# Altium PCB MMC_2_4.PcbDoc
Units mm, origin at the board's own origin, x right, y up, seen from the top; angles counter-clockwise.
Board outline 99.21 x 82.02 mm, 4 copper layers (Top Layer, 3V3, GND, Bottom Layer), stack 0.778 mm thick; 99 components, 93 nets, 400 pads, 234 vias.
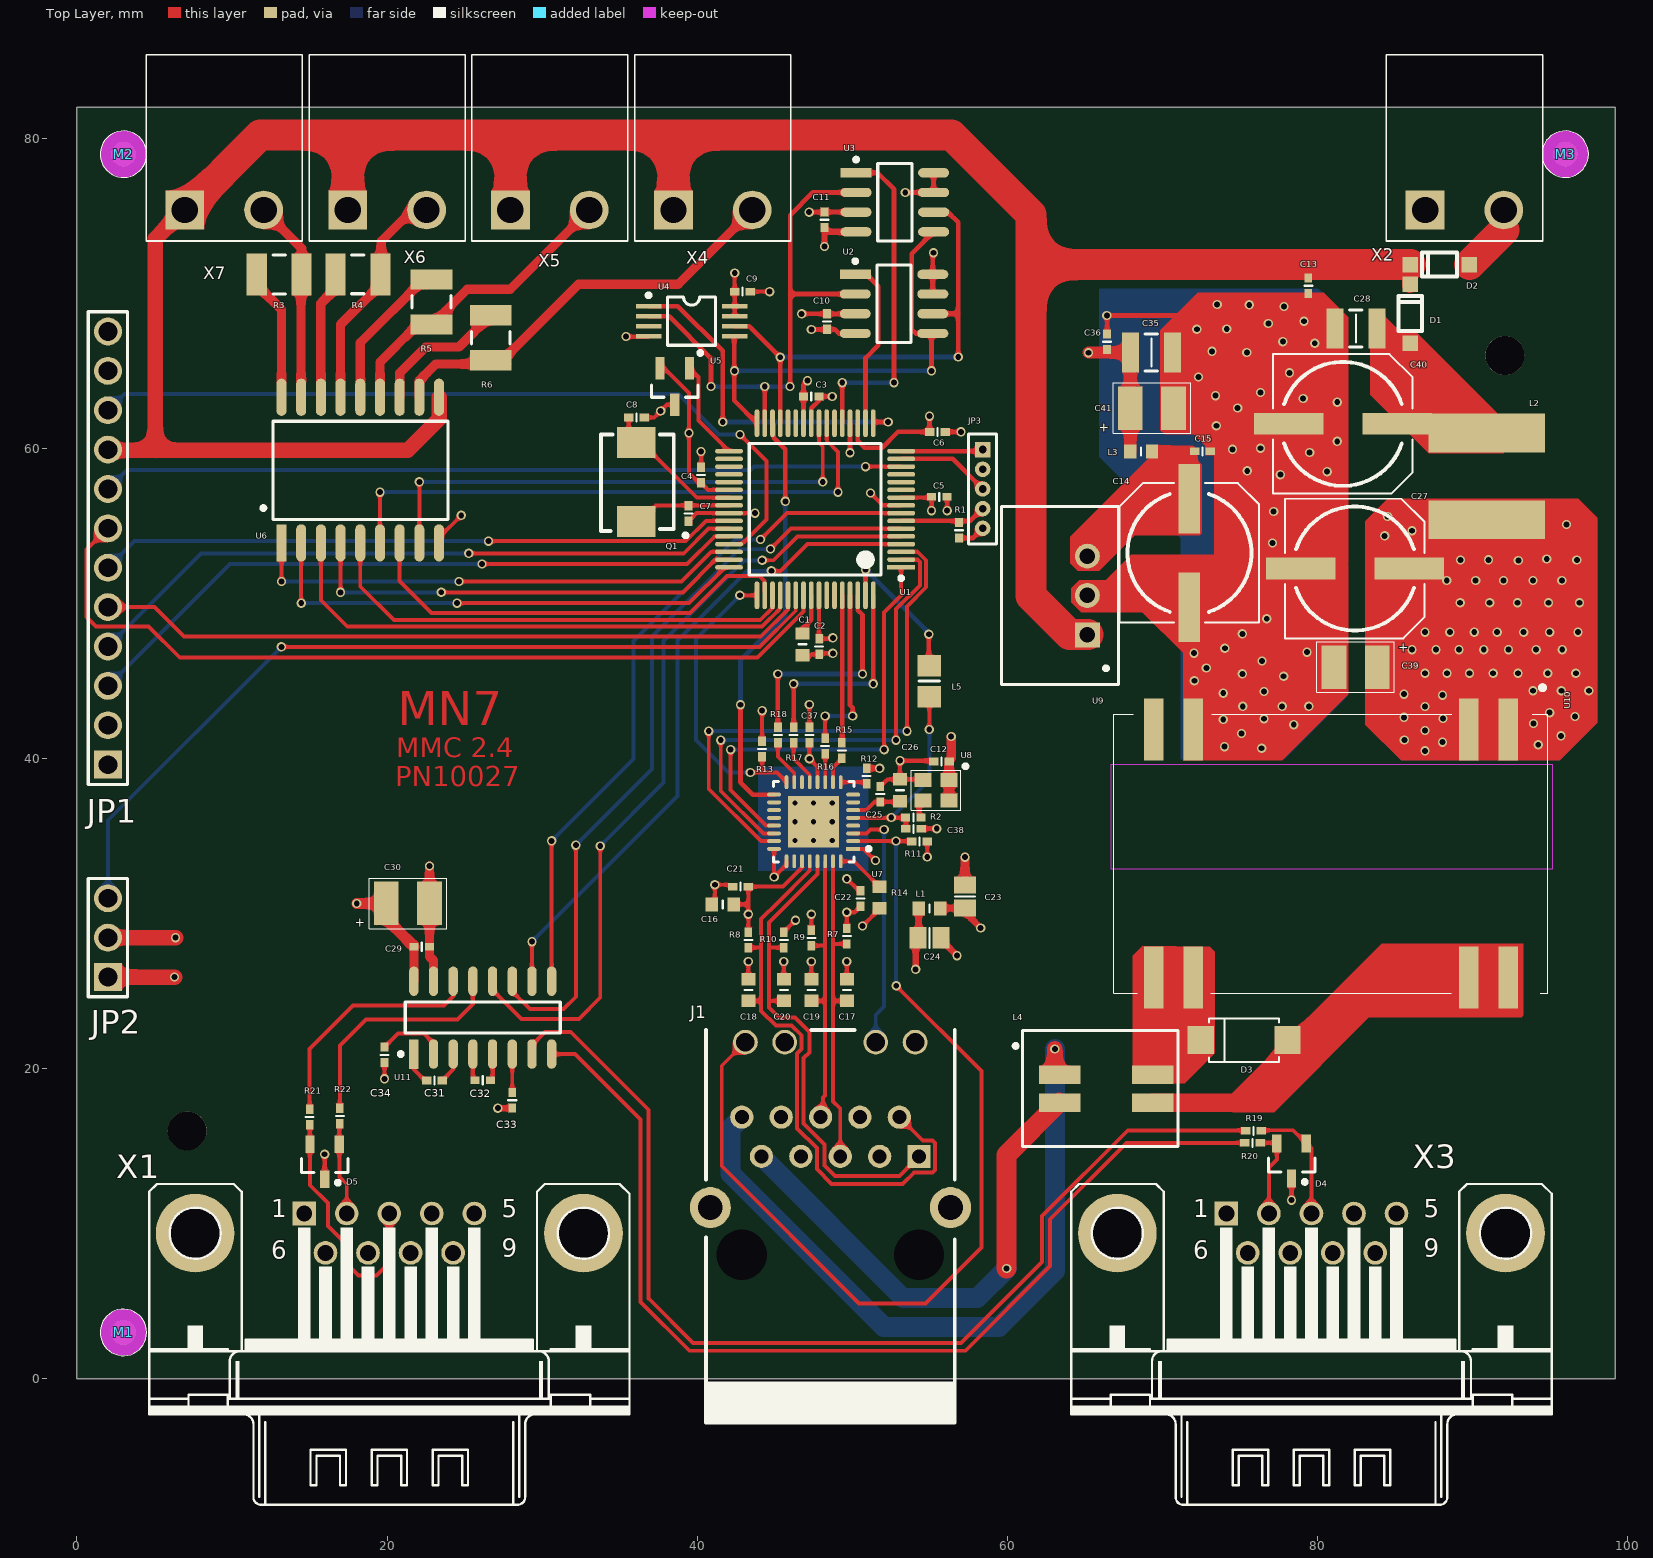
[diagram p0: Top Layer view]
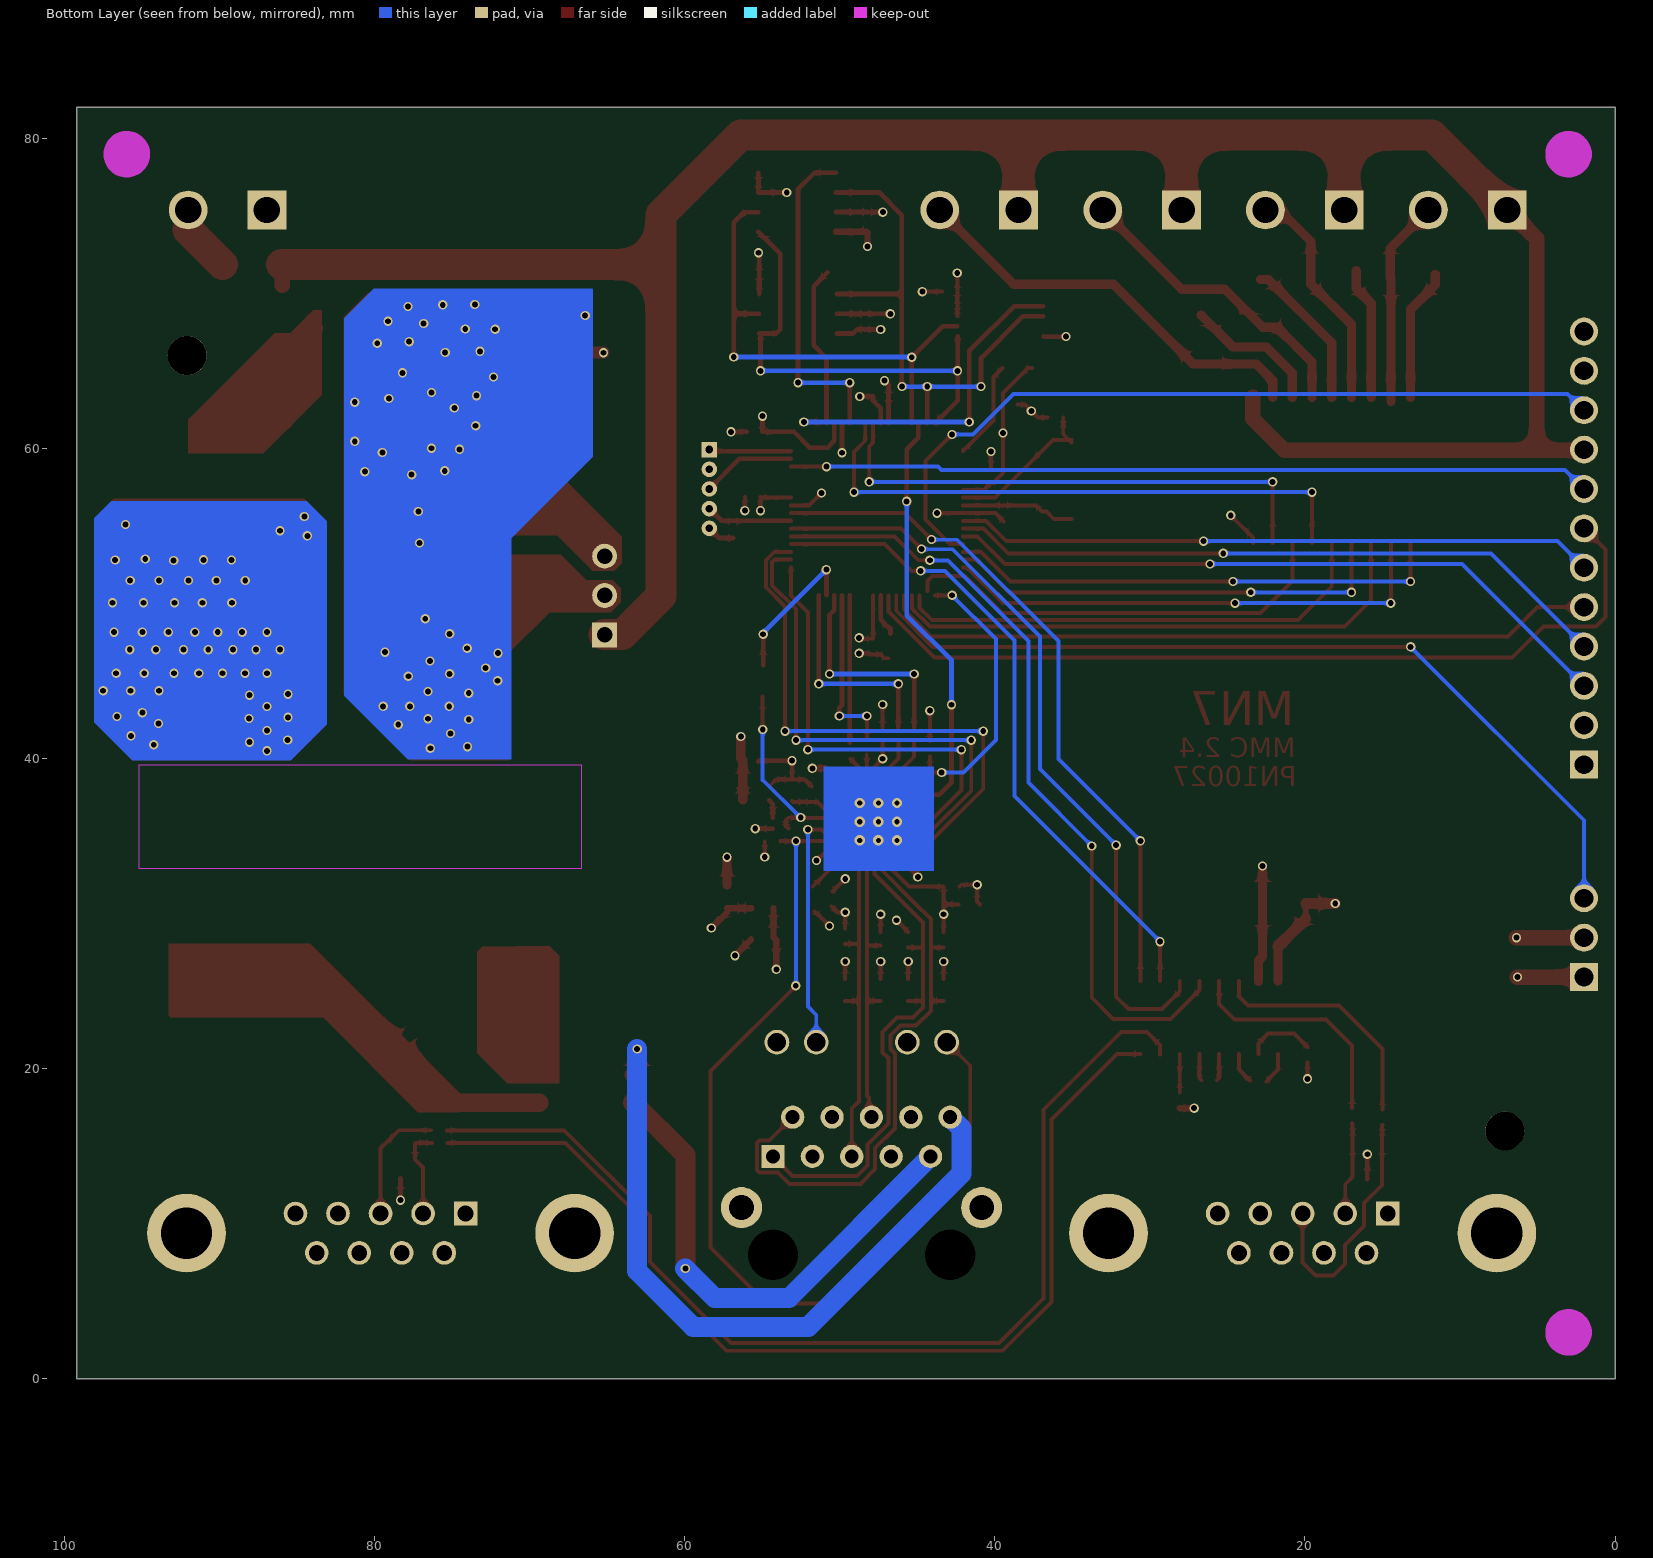
[diagram p1: Bottom Layer view, seen from below]
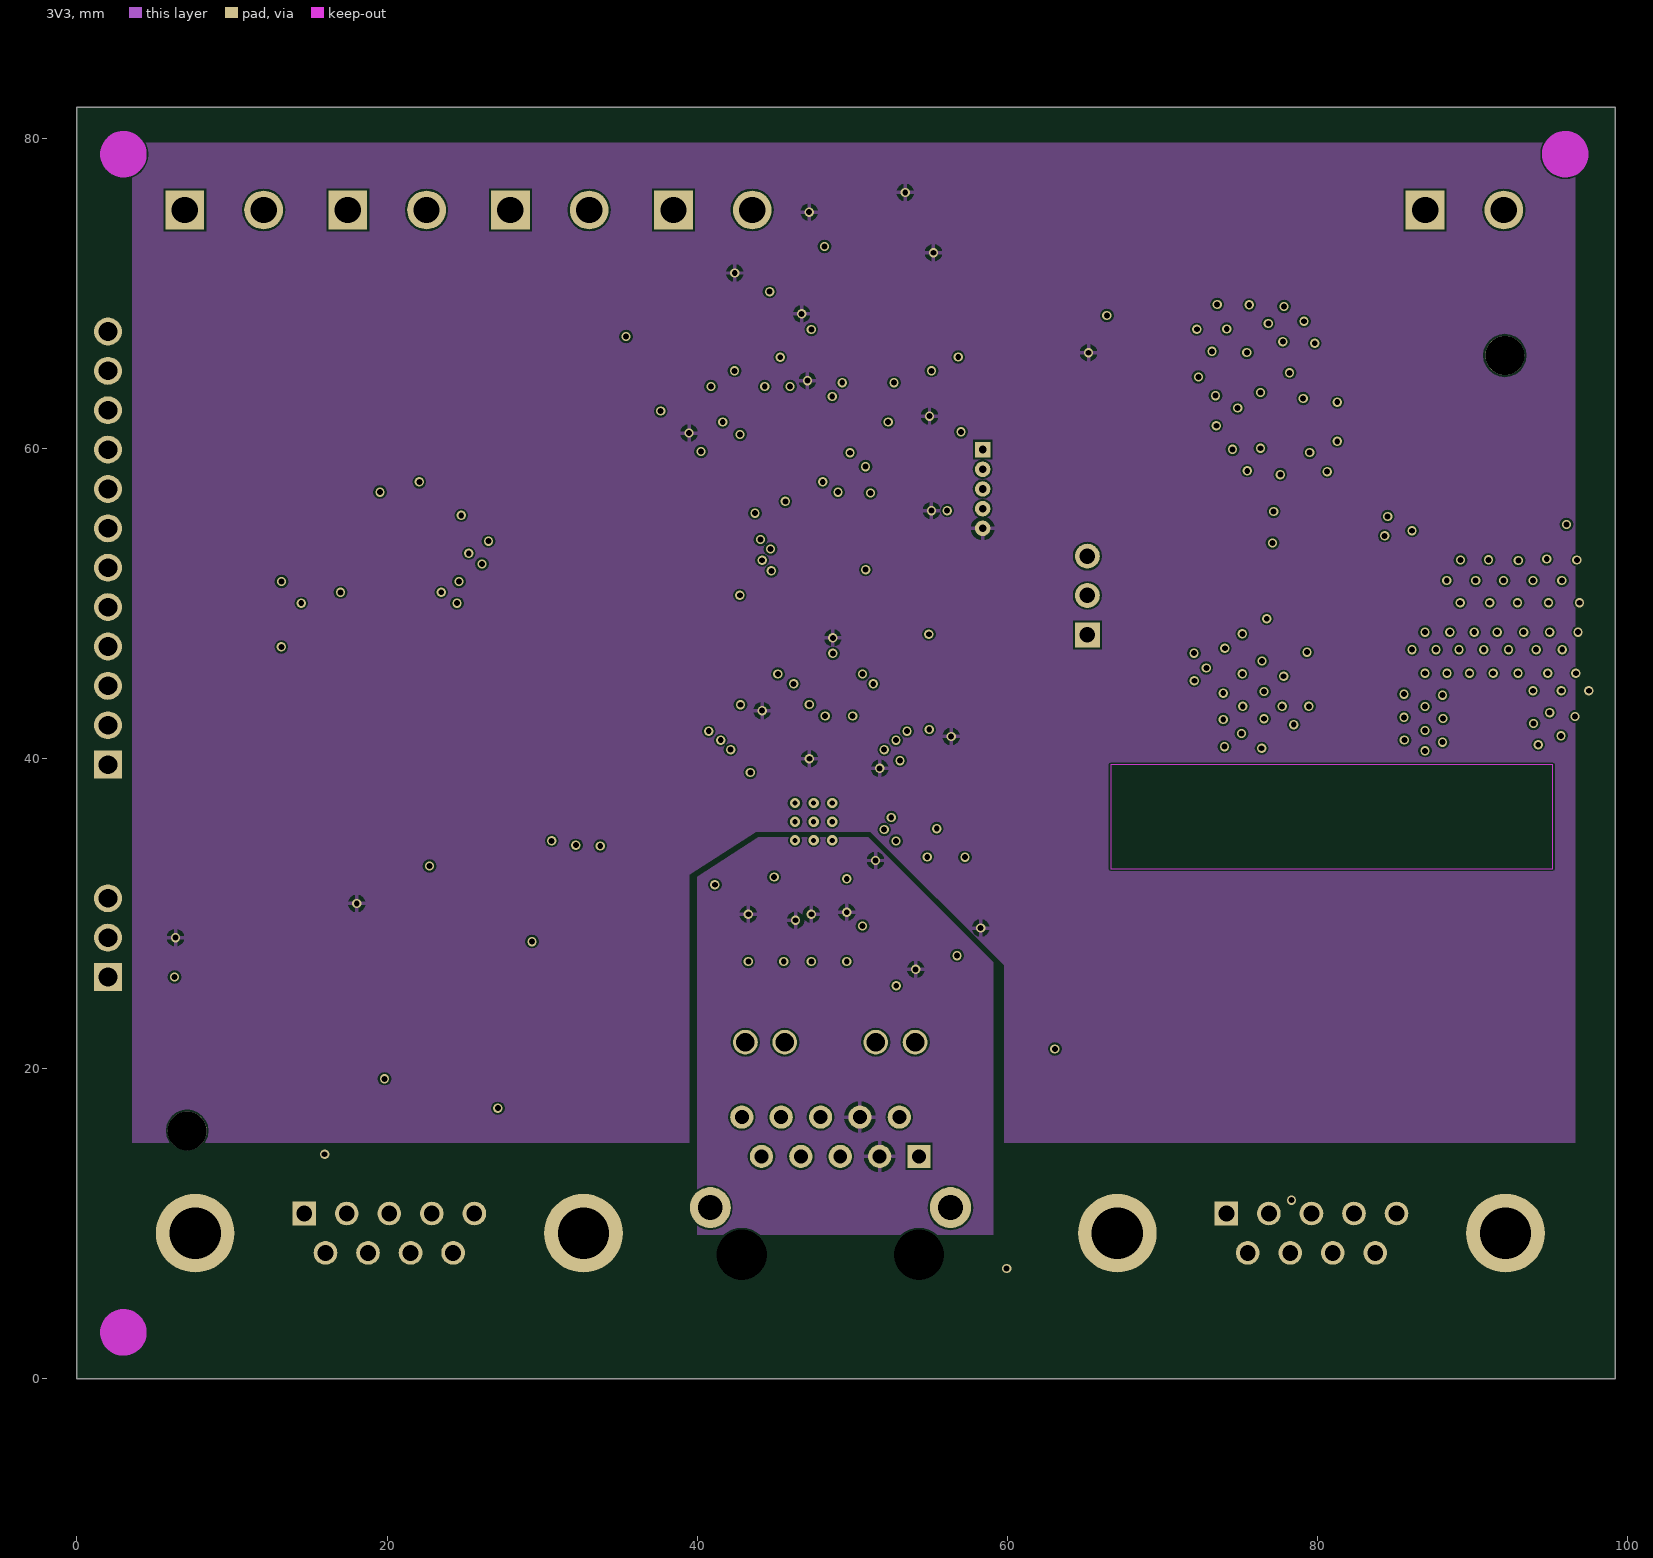
[diagram p2: 3V3]
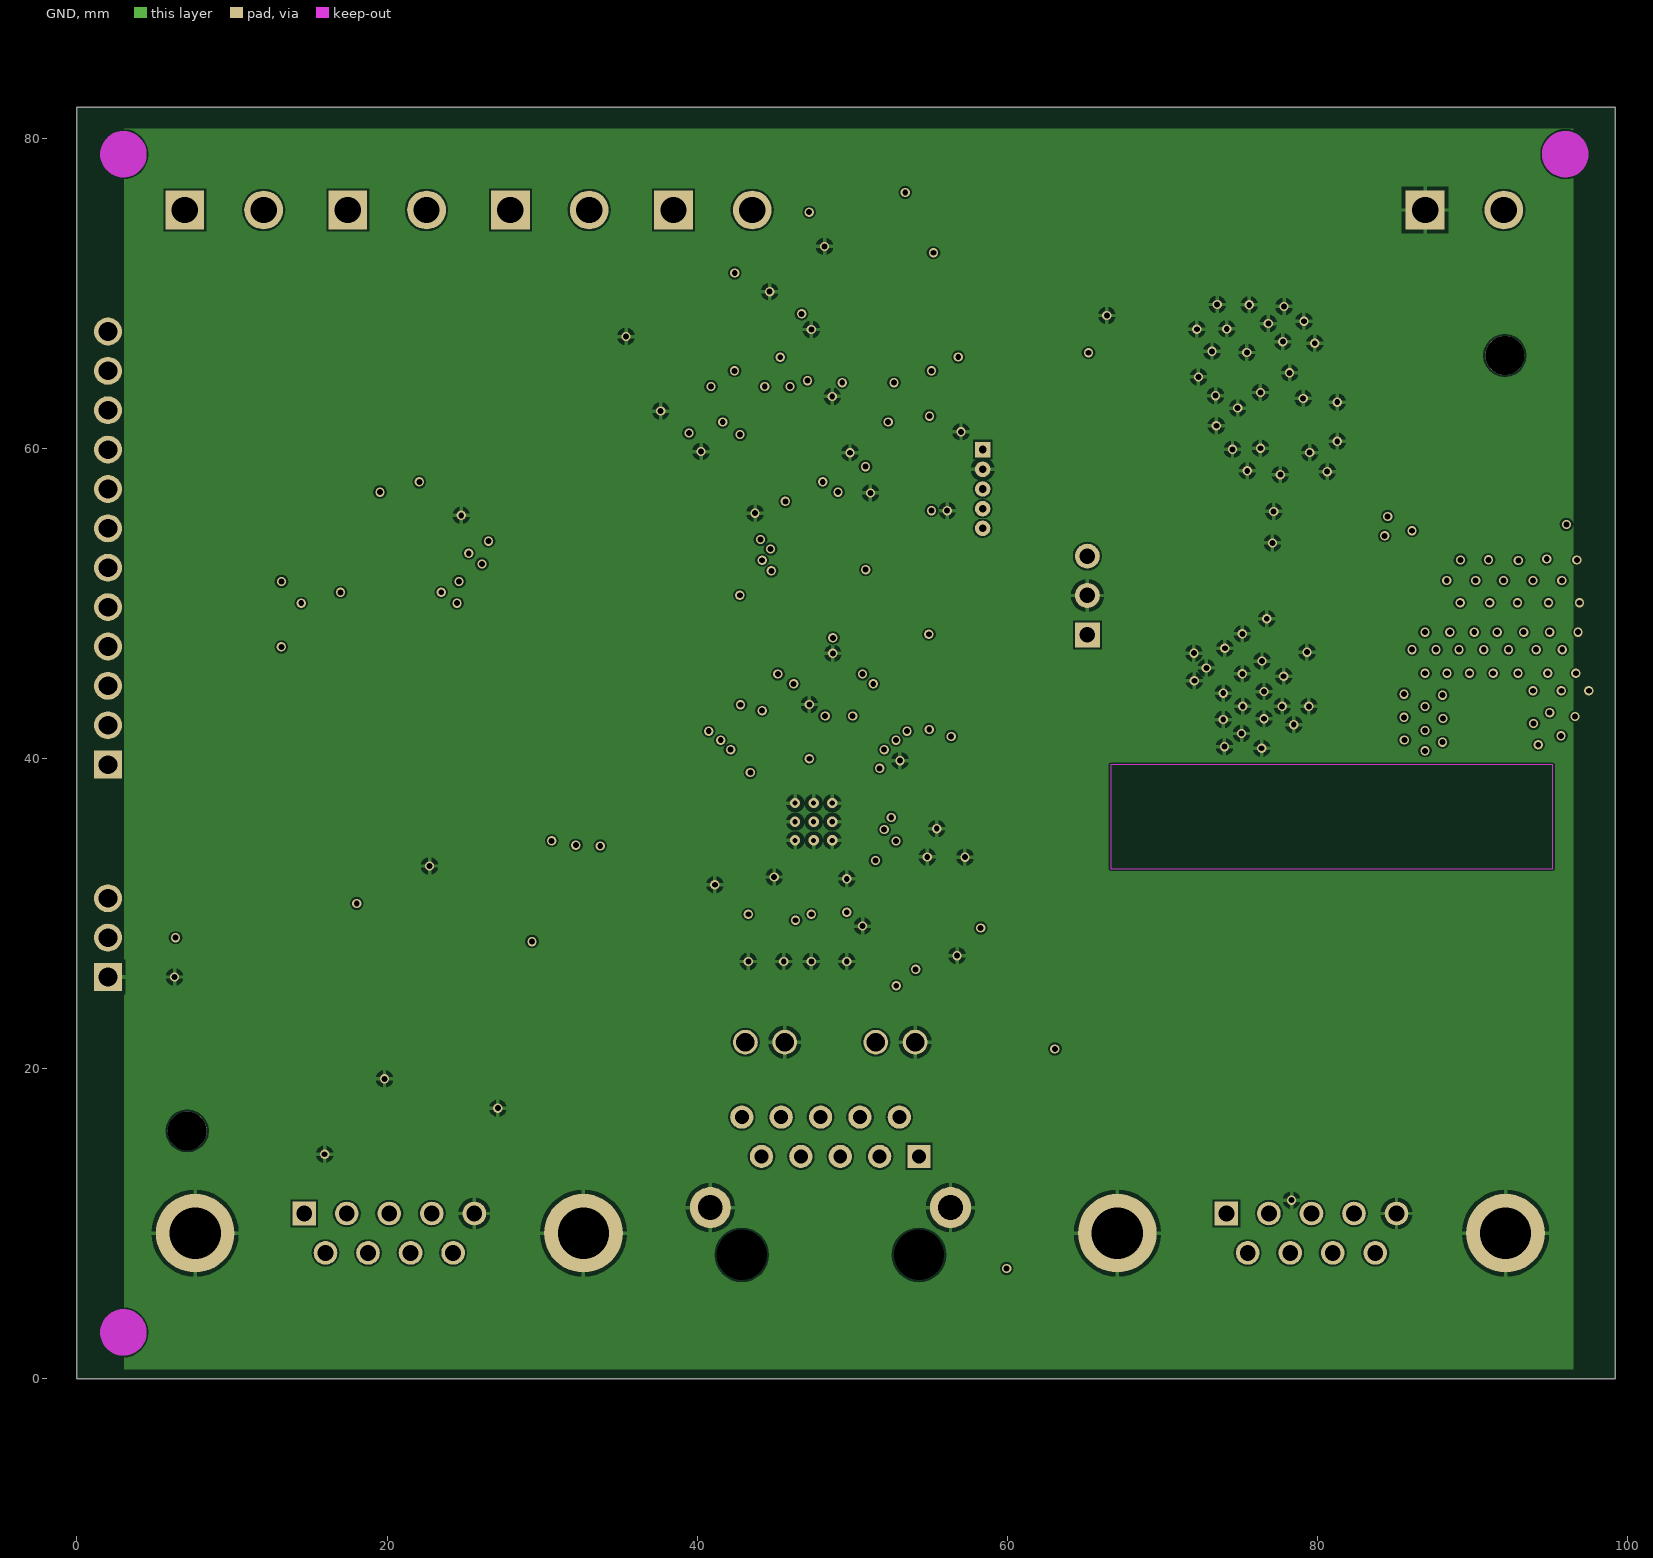
[diagram p3: GND]
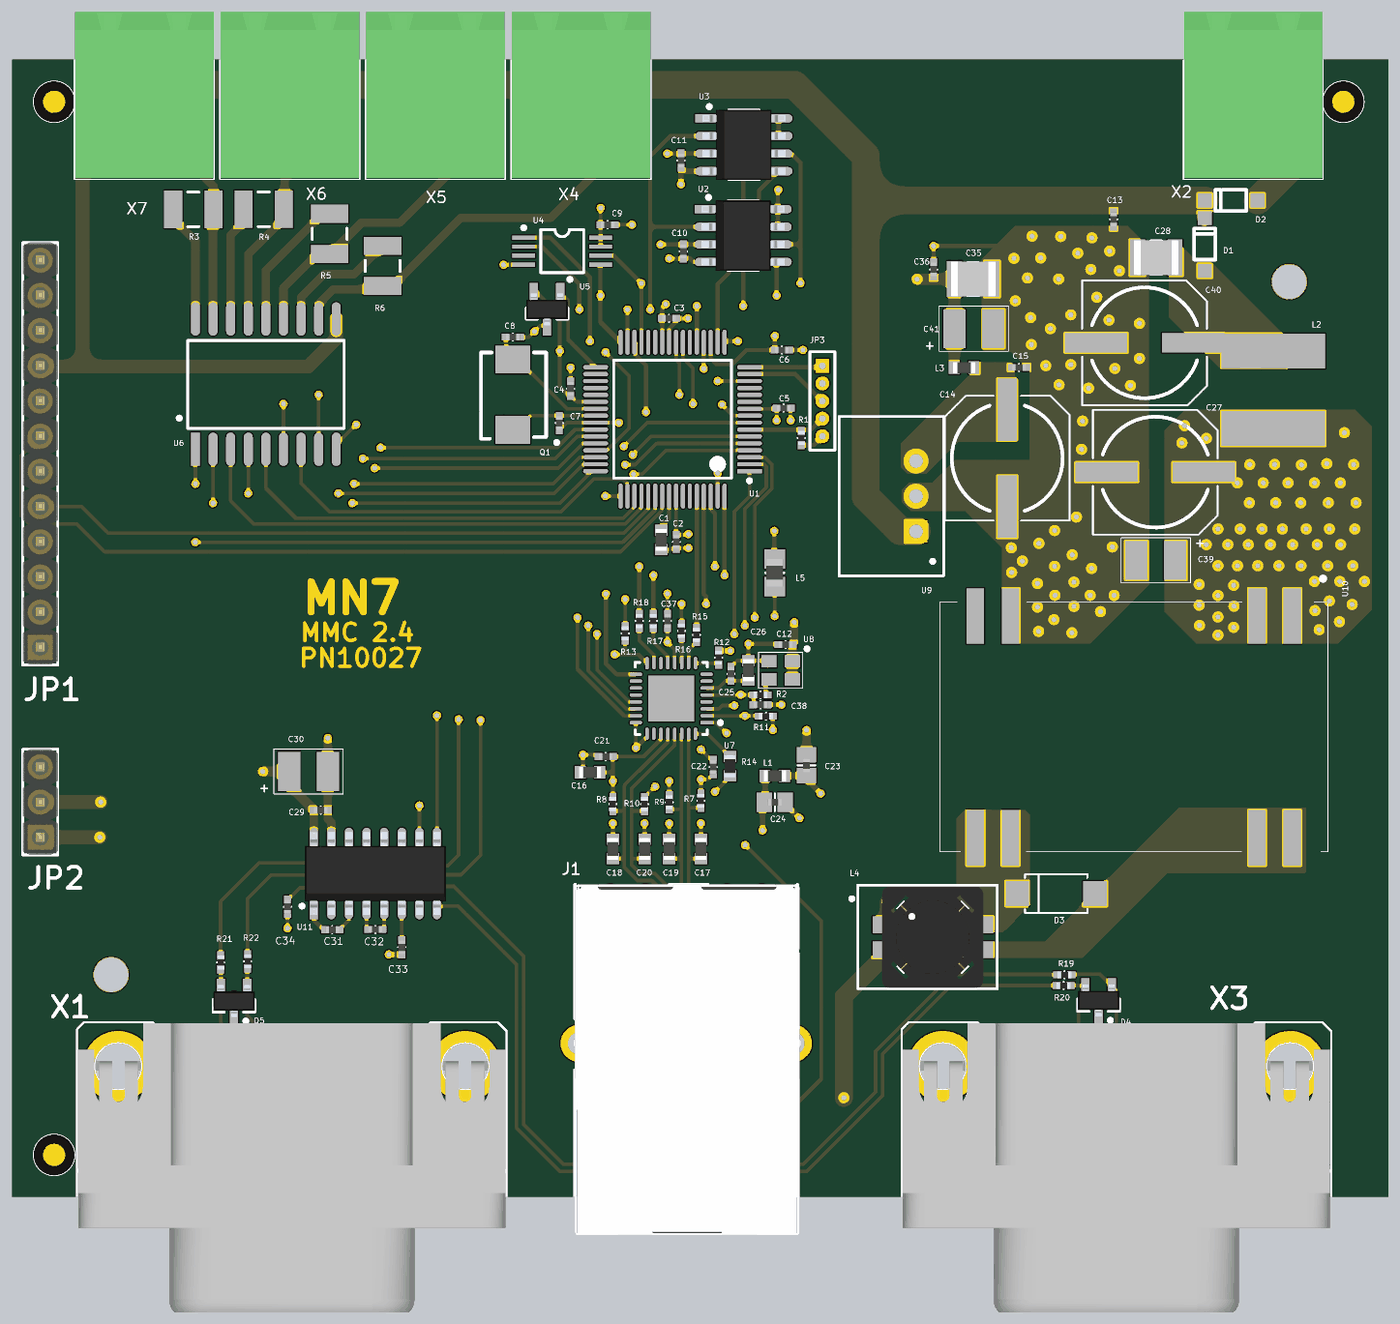
[diagram p4: 3D render of the assembled board from above, using the file's embedded part models]

## Layer stack, top to bottom
Top Solder: solder mask 0.0102, Solder Resist, Dk 3.5
Top Layer: signal copper 0.0356
Dielectric 1: core 0.254, FR-4, Dk 4.2
3V3: signal copper 0.036
Dielectric 3: prepreg 0.127, Dk 4.2
GND: signal copper 0.036
Dielectric 2: core 0.254, Dk 4.2
Bottom Layer: signal copper 0.0356
Bottom Solder: solder mask 0.0102, Solder Resist, Dk 3.5

## Board outline
0,0 0,82.017 99.212,82.017 99.212,0

## Design rules (kind name [scope] priority, off if disabled: settings)
Clearance [All] p1: gap=0.12
ComponentClearance [All] p1: gap=0 collisioncheckmode=3 verticalgap=0 showdistances=FALSE
DiffPairsRouting [All] p1: maxlimit=0.254 minlimit=0.18 mostfreqgap=0.254 toplayer_minwidth=0.18 toplayer_maxwidth=0.381 toplayer_prefwidth=0.381 midlayer1_minwidth=0.18 midlayer1_maxwidth=0.381 midlayer1_prefwidth=0.381 midlayer2_minwidth=0.18 midlayer2_maxwidth=0.381 midlayer2_prefwidth=0.381 bottomlayer_minwidth=0.18 bottomlayer_maxwidth=0.381 bottomlayer_prefwidth=0.381 maxuncoupledlength=12.7
HoleSize [All] p1: absolutevalues=TRUE maxlimit=4 minlimit=0.025 maxpercent=80.000 minpercent=20.000
MinimumSolderMaskSliver [(HasFootprint('32M1-A_M') AND  InComponent('R14') AND InComponent('R13') AND InComponent('JP3'))] p1: minsoldermaskwidth=0.05
MinimumSolderMaskSliver MinimumSolderMaskSliver_IC [HasFootprint('32M1-A_M')] p2: minsoldermaskwidth=0.03
PolygonConnect [All] p1: connectstyle=Relief reliefconductorwidth=0.254 reliefentries=4 polygonreliefangle="90 Angle" airgapwidth=0.254
RoomDefinition MMC_2_4_MCU [InComponentClass('MMC_2_4_MCU')] p1: confinementstyle=ConfineIn formatcopy=TRUE lockcomponents=FALSE outline -7.988,-13.754 125.717,-13.754 125.717,95.644 -7.988,95.644
RoomDefinition MMC_2_4_Ethernet [InComponentClass('MMC_2_4_Ethernet')] p2: confinementstyle=ConfineIn formatcopy=TRUE lockcomponents=FALSE outline -10.566,-10.376 125.717,-10.376 125.717,93.066 -10.566,93.066
RoomDefinition MMC_2_4_PSU [InComponentClass('MMC_2_4_PSU')] p3: confinementstyle=ConfineIn formatcopy=TRUE lockcomponents=FALSE outline -2.197,-10.389 103.378,-10.389 103.378,87.757 -2.197,87.757
RoutingVias [All] p1: holewidth=0.381 width=0.584 viastyle="Through Hole" minholewidth=0.3 minwidth=0.3 maxholewidth=0.711 maxwidth=1.27
SilkToBoardRegionClearance [(HasFootprint('M09HP') AND HasFootprint('MSTBA 2,5_2-G-5,08-LR') AND IsEmbeddedBoard)] p1:
SilkToSilkClearance [All] p1: silktosilkclearance=0.12
SilkToSolderMaskClearance SilkToSolderMaskClearance_1 [HasFootprint('M09HP')] p1: minsilkscreentomaskgap=0 clearancetoexposedcopper=TRUE
SilkToSolderMaskClearance [IsPad] p2: minsilkscreentomaskgap=0.05 clearancetoexposedcopper=TRUE
SolderMaskExpansion [All] p1: expansion=0.102
Width [All] p1: maxlimit=2 minlimit=0.254 preferedwidth=0.3
23 further rules are at their usual default settings.

## Classes and differential pairs
component class MMC_2_4_MCU: C1 C2 C3 C4 C5 C6 C7 C8 C9 C10 C11 JP1 JP2 JP3 M1 M2 M3 Q1 R1 U1 U2 U3 U4 U5
component class MMC_2_4_Ethernet: C12 C16 C17 C18 C19 C20 C21 C22 C23 C24 C25 C26 C29 C30 C31 C32 C33 C34 C37 C38 D4 D5 J1 L1 L5 R2 R3 R4 R5 R6 R7 R8 R9 R10 R11 R12 R13 R14 R15 R16 R17 R18 R19 R20 R21 R22 U6 U7 U8 U11 X1 X3 X4 X5 X6 X7
component class MMC_2_4_PSU: C13 C14 C15 C27 C28 C35 C36 C39 C40 C41 D1 D2 D3 L2 L3 L4 U9 U10 X2
differential pair RX: +RX_P -RX_N
differential pair TX: +TX_P -TX_N

## Components (designator, comment, footprint, x,y, rotation, side; value= is the part's Value field where it differs from the comment)
C1 "10uF10V_0603" C0603 46.787,47.384 r270 top
C2 "100nF16V_0402" C0402 47.879,47.244 r270 top
C3 "100nF16V_0402" C0402 47.363,63.373 r0 top
C4 "100nF16V_0402" C0402 40.259,58.301 r90 top
C5 "100nF16V_0402" C0402 55.626,56.896 r0 top
C6 "100nF16V_0402" C0402 55.499,61.087 r0 top
C7 "22pF50V_0402-AVX" C0402 39.446,55.816 r270 top
C8 "22pF50V_0402-AVX" C0402 36.093,62.014 r0 top
C9 "100nF16V_0402" C0402 42.926,70.129 r0 top
C10 "100nF16V_0402" C0402 48.387,68.199 r270 top
C11 "100nF16V_0402" C0402 48.222,74.765 r270 top
C12 "100nF16V_0402" C0402 55.766,39.827 r180 top
C13 "100nF25V_0402" C0402 79.426,70.51 r270 top
C14 "470uF25V_POL_FT" Panasonic-FT-F_Case 71.755,53.276 r90 top
C15 "100nF25V_0402" C0402 72.606,59.83 r0 top
C16 "22nF50V_0603" C0603 41.656,30.607 r180 top
C17 "10pF50V_0603" C0603 49.657,25.084 r90 top
C18 "10pF50V_0603" C0603 43.307,25.084 r90 top
C19 "10pF50V_0603" C0603 47.371,25.084 r90 top
C20 "10pF50V_0603" C0603 45.593,25.084 r90 top
C21 "100nF25V_0402" C0402 42.799,31.75 r180 top
C22 "100nF25V_0402" C0402 50.546,30.988 r90 top
C23 "4u7F25V_0805" C0805 57.277,31.115 r90 top
C24 "4u7F25V_0805" C0805 54.991,28.448 r0 top
C25 "470pF50V_0402" C0402 51.816,37.719 r90 top
C26 "1uF50V_0603" C0603 53.086,37.973 r90 top
C27 "470uF25V_POL_FT" Panasonic-FT-F_Case 82.436,52.273 r0 top
C28 "10uF50V_1210" C1210 82.499,67.754 r180 top
C29 "100nF25V_0402" C0402 22.238,27.877 r0 top
C30 "10uF_20V_V293D-B" Vishay293D-B 21.349,30.67 r180 top
C31 "100n50V_0402" C0402 23.063,19.253 r180 top
C32 "100n50V_0402" C0402 26.175,19.266 r180 top
C33 "100n50V_0402" C0402 28.08,17.97 r270 top
C34 "100n50V_0402" C0402 19.837,20.904 r270 top
C35 "10uF25V_1210" C1210 69.304,66.205 r0 top
C36 "100nF25V_0402" C0402 66.446,66.904 r90 top
C37 "100nF25V_0402" C0402 47.244,41.542 r90 top
C38 "16pF50V_0402" C0402 53.962,35.484 r0 top
C39 "10uF_20V_V293D-B" Vishay293D-B 82.474,45.91 r0 top
C40 "470uF25V_POL_FT" Panasonic-FT-F_Case 81.661,61.608 r0 top
C41 "100uF_6V3_V293D-B" Vishay293D-B 69.342,62.624 r180 top
D1 "RB160M-30TR" SOD123 86.004,68.707 r90 top
D2 "RB160M-30TR" SOD123 87.909,71.882 r180 top
D3 "SMAJ58A-E3/61" DO214A 75.286,21.857 r180 top
D4 "PESD12VS2UT" SOT23_N 78.346,14.059 r270 top
D5 "PESD12VS2UT" SOT23_N 15.977,14.008 r270 top
J1 "7499210124A" 7499210124A 48.6,8 r180 top
JP1 "Plug_12_2.54" HDR1X12_2.54 2,53.594 r90 top
JP2 "Header-3" HDR1X3 2,28.463 r90 top
JP3 "ICDI" HDR1X5-1.27 58.42,57.404 r270 top
L1 "120R4A_0603" L0603 54.991,30.353 r0 top
L2 "10uF2A" WE-PD2_1 90.945,58.217 r90 top
L3 "300R2A_0603" L0603 68.644,59.817 r180 top
L4 "1000R1A-SCC" WE-SCC_7345 66.396,18.707 r270 top
L5 "2k200mA_0805" L0805_M 54.978,45.009 r90 top
M1 "Paste Mark" Mark-3mm 3,3 r0 top
M2 "Paste Mark" Mark-3mm 3,79 r0 top
M3 "Paste Mark" Mark-3mm 96,79 r0 top
Q1 "Crystal_8MHz" TXC_7A 36.081,57.861 r90 top
R1 "10k_0402" R0402 56.896,54.737 r270 top
R2 "33R_0402" R0402 53.95,36.208 r180 top
R3 "270R_1210" R1210_N 13.043,71.234 r0 top
R4 "270R_1210" R1210_N 18.123,71.247 r0 top
R5 "270R_1210" R1210_N 22.873,69.469 r270 top
R6 "270R_1210" R1210_N 26.695,67.158 r270 top
R7 "49R9_0402" R0402 49.657,28.559 r90 top
R8 "49R9_0402" R0402 43.307,28.321 r90 top
R9 "49R9_0402" R0402 47.371,28.448 r90 top
R10 "49R9_0402" R0402 45.593,28.321 r90 top
R11 "10k_0402" R0402 54.348,34.671 r180 top
R12 "10k_0402" R0402 50.94,38.887 r90 top
R13 "1k5_0402" R0402 44.196,40.64 r90 top
R14 "12k1_0603" R0603(1608) 51.752,31.051 r90 top
R15 "10R_0402" R0402 49.34,40.526 r90 top
R16 "10R_0402" R0402 48.26,40.818 r90 top
R17 "10R_0402" R0402 46.228,41.529 r90 top
R18 "10R_0402" R0402 45.212,41.529 r90 top
R19 "10R_0402" R0402 75.882,16.002 r180 top
R20 "10R_0402" R0402 75.819,15.227 r180 top
R21 "10R_0402" R0402 15.011,16.891 r270 top
R22 "10R_0402" R0402 16.954,16.967 r270 top
U1 "PIC32MX695F512H-80I/PT" TQFP-64_N1 47.613,56.096 r180 top
U2 "25LC1024-I_SM" SOP8_N 52.705,69.342 r0 top
U3 "25LC1024-I_SM" SOP8_N 52.756,75.895 r0 top
U4 "23LC1024-I_ST" TSSOP8 39.649,68.224 r270 top
U5 "11AA02E48T-I_TT" SOT23_M 38.557,64.021 r270 top
U6 "ULN2803ADW" SOIC18-WIDE 18.275,58.623 r90 top
U7 "LAN8741-EN" 32M1-A_M 47.519,35.941 r180 top
U8 "SG - 211 S*E -50.000M" "SG - 211 S*E" 55.41,37.973 r180 top
U9 "R-783.3-0.5" R-783_3-0_5 65.176,50.533 r90 top
U10 "AG-9812M" Ag9812M 80.886,33.884 r180 top
U11 "MAX3232CSE" SOIC16_L 26.175,23.304 r90 top
X1 "SUB-D_9" M09HP 20.147,9.4 r0 top locked
X2 "WR-TBL3127" WR-TBL-3127 89.5,75.4 r0 top
X3 "SUB-D_9" M09HP 79.63,9.4 r0 top locked
X4 "WR-TBL3127" WR-TBL-3127 41.015,75.4 r0 top
X5 "WR-TBL3127" WR-TBL-3127 30.5,75.4 r0 top
X6 "WR-TBL3127" WR-TBL-3127 20.01,75.4 r0 top
X7 "WR-TBL3127" WR-TBL-3127 9.5,75.4 r0 top

## Footprints (in the part's own frame and the unit in brackets; to place one, negate y for a bottom-side part, rotate by r counter-clockwise, add the part's x,y. Pads: shape width x height; smd on the part's side, far side on the other; paste and mask are expansions set on the pad)
32M1-A_M [mm] "QFN, 32-Leads, Body 5x5mm, Pitch 0.5mm, IPC Low Density"
  rect 0.9x0.25 smd: 1(-2.55,1.75)
  oval 0.9x0.25 smd: 2(-2.55,1.25) 3(-2.55,0.75) 4(-2.55,0.25) 5(-2.55,-0.25) 6(-2.55,-0.75) 7(-2.55,-1.25) 8(-2.55,-1.75) 17(2.55,-1.75) 18(2.55,-1.25) 19(2.55,-0.75) 20(2.55,-0.25) 21(2.55,0.25) 22(2.55,0.75) 23(2.55,1.25) 24(2.55,1.75)
  oval 0.25x0.9 smd: 9(-1.75,-2.55) 10(-1.25,-2.55) 11(-0.75,-2.55) 12(-0.25,-2.55) 13(0.25,-2.55) 14(0.75,-2.55) 15(1.25,-2.55) 16(1.75,-2.55) 25(1.75,2.55) 26(1.25,2.55) 27(0.75,2.55) 28(0.25,2.55) 29(-0.25,2.55) 30(-0.75,2.55) 31(-1.25,2.55) 32(-1.75,2.55)
  rect 3.3x3.3 smd: 33(0,0)
  silkscreen extent -3.68,-2.6 2.6,2.6, body extent -2.58,-2.58 2.58,2.58, height 1
7499210124A [mm] "Connector; PCB Jack, Thru-Hole; RJ45,POE; Shielded with Lightpipes; Right Angle"
  rect 1.5x1.5 hole 0.9: 1(-5.715,-6.35)
  round 1.5 hole 0.9: 2(-4.445,-8.89) 3(-3.175,-6.35) 4(-1.905,-8.89) 5(-0.635,-6.35) 6(0.635,-8.89) 7(1.905,-6.35) 8(3.175,-8.89) 9(4.445,-6.35) 10(5.715,-8.89)
  round 1.6 hole 1.2: 11(-5.465,-13.72) 12(-2.925,-13.72) 13(2.946,-13.72) 14(5.486,-13.72)
  round 2.65 hole 1.6: MH1(-7.745,-3.05) MH2(7.745,-3.05)
  round 2.95 hole 3.25 unplated: MH3(-5.715,0) MH4(5.715,0)
  silkscreen extent -8.02,-14.5 8.02,10.8, body extent -8.27,-14.51 8.13,10.79, height 13.81
Ag9812M [mm] "Silvertel, Ag9812M"
  rect 1.25x4 smd: 1(-11.43,-8) 1(-8.89,-8) 2(8.89,-8) 3(11.43,-8) 4(8.89,8) 4(11.43,8) 5(-11.43,8) 5(-8.89,8)
  silkscreen extent -14,-10.84 14,9, body extent -14,-9 14,9, height 12
C0402 [mm] "Chip Capacitor, Body 1.0x0.5mm, IPC High Density"
  rect 0.6x0.5 smd: 1(-0.5,0) 2(0.5,0)
  silkscreen extent 0,-0.25 0,0.25, body extent -0.5,-0.25 0.5,0.25, height 0.5
C0603 [mm] "Chip Capacitor, 0603"
  rect 0.8x0.9 smd: 1(-0.7,0) 2(0.7,0)
  silkscreen extent 0,-0.25 0,0.25, body extent -0.8,-0.4 0.8,0.4, height 0.8
C0805 [mm] "Chip Capacitor, Body 2.0x1.3mm, IPC High Density"
  rect 1.1x1.4 smd: 1(-0.75,0) 2(0.75,0)
  silkscreen extent 0,-0.64 0,0.64, body extent -0.5,-0.25 0.5,0.25, height 0.5
C1210 [mm] "Chip Capacitor, Body 3.2x2.5mm, IPC High Density"
  rect 1.1x2.6 smd: 1(-1.35,0) 2(1.35,0)
  silkscreen extent -0.4,-1.2 0.4,1.2, body extent -1.6,-1.25 1.6,1.25, height 1.35
DO214A [mm] "Diode; 2 Leads"
  rect 1.7x1.8 smd: 1(2.8,0) 2(-2.8,0)
  silkscreen extent -2.25,-1.4 2.25,1.4, body extent -2.25,-1.4 2.25,1.4, height 2.3
HDR1X3 [mm] "Connector; Header; 3 Position"
  rect 1.8x1.8 hole 1.2: 1(-2.54,0)
  round 1.8 hole 1.2: 2(0,0) 3(2.54,0)
  silkscreen extent -3.81,-1.27 3.81,1.27, body extent -3.81,-1.27 3.81,1.27, height 8.62
HDR1X5-1.27 [mm] "Connector; Header; 5 Position"
  rect 1x1 hole 0.5: 1(-2.54,0)
  round 1 hole 0.5: 2(-1.27,0) 3(0,0) 4(1.27,0) 5(2.54,0)
  silkscreen extent -3.55,-0.9 3.55,0.9, body extent -3.56,-0.89 3.56,0.89, height 7
HDR1X12_2.54 [mm] "Connector; Header; 11 Position"
  rect 1.8x1.8 hole 1.2: 1(-13.97,0)
  round 1.8 hole 1.2: 2(-11.43,0) 3(-8.89,0) 4(-6.35,0) 5(-3.81,0) 6(-1.27,0) 7(1.27,0) 8(3.81,0) 9(6.35,0) 10(8.89,0) 11(11.43,0) 12(13.97,0)
  silkscreen extent -15.24,-1.27 15.24,1.27, body extent -15.21,-1.27 15.27,1.27, height 8.62
L0603 [mm] "Chip Ferrit, 0603"
  rect 0.8x0.9 smd: 1(-0.7,0) 2(0.7,0)
  silkscreen extent 0,-0.25 0,0.25, body extent -0.8,-0.4 0.8,0.4, height 0.8
L0805_M [mm] "Chip, Body 2.0x1.2mm, IPC Low Density"
  rect 1.4x1.5 smd: 1(-1,0) 2(1,0)
  silkscreen extent 0,-0.65 0,0.65, body extent -1,-0.6 1,0.6, height 0.9
M09HP [mil]
  rect 60x60 hole 40: 1(-216,50)
  round 60 hole 40: 2(-108,50) 3(0,50) 4(108,50) 5(216,50) 6(-162,-50) 7(-54,-50) 8(54,-50) 9(162,-50)
  round 200 hole 130: 10(-493,0) 10(493,0)
  silkscreen extent -610,-690 610,125, body extent -606,-699 606,123, height 542
Mark-3mm [mm]
  round 1.6 smd paste-2: 0(0,0)
  Keep-Out Layer circle w2: c0,0 r0.5
  silkscreen extent -1.5,-1.5 1.5,1.5
Panasonic-FT-F_Case [mm] "SMD electrolytic, Panasonic"
  rect 4.5x1.4 smd: 1(3.5,0) 2(-3.5,0)
  silkscreen extent -4.5,-4.5 4.5,4.5, body extent -4.5,-4.5 4.5,4.5, height 10.4
R0402 [mm] "Chip Resistor, Body 1.0x0.5mm"
  rect 0.6x0.5 smd: 1(-0.5,0) 2(0.5,0)
  silkscreen extent 0,-0.25 0,0.25, body extent -0.5,-0.24 0.5,0.26, height 0.4
R0603(1608) [mm] "Chip Resistor, 0603"
  rect 0.8x0.9 smd: 1(-0.7,0) 2(0.7,0)
  body extent -0.8,-0.4 0.8,0.4, height 0.5
R1210_N [mm] "Chip Resistor Body 3.2x2.5mm"
  rect 1.3x2.7 smd: 1(-1.45,0) 2(1.45,0)
  silkscreen extent -0.4,-1.25 0.4,1.25, body extent -1.7,-1.35 1.7,1.35, height 1.5
R-783_3-0_5 [mm] "Recon DC-DC"
  rect 1.6x1.6 hole 1: 1(-2.54,0)
  round 1.6 hole 1: 2(0,0) 3(2.54,0)
  silkscreen extent -5.75,-2 5.75,5.55, body extent -5.71,-2.03 5.71,5.59, height 10.2
"SG - 211 S*E" [mm]
  rect 1.1x0.9 smd: 1(-0.85,-0.65) 2(0.85,-0.65) 3(0.85,0.65) 4(-0.85,0.65)
  silkscreen extent -2.02,-1.67 1.6,1.3, body extent -1.25,-1 1.25,1, height 1.3
SOD123 [mm]
  rect 1x1 smd: 1(1.905,0) 2(-1.905,0)
  silkscreen extent -1.1,-0.76 1.14,0.76, body extent -1.4,-0.85 1.4,0.88, height 1.4
SOIC16_L [mm] "SOIC, 16-Leads, Body 9.9x3.9mm, Pitch 1.27mm, IPC High Density"
  rect 1.9x0.6 smd: 1(-2.35,4.445)
  oval 1.9x0.6 smd: 2(-2.35,3.175) 3(-2.35,1.905) 4(-2.35,0.635) 5(-2.35,-0.635) 6(-2.35,-1.905) 7(-2.35,-3.175) 8(-2.35,-4.445) 9(2.35,-4.445) 10(2.35,-3.175) 11(2.35,-1.905) 12(2.35,-0.635) 13(2.35,0.635) 14(2.35,1.905) 15(2.35,3.175) 16(2.35,4.445)
  silkscreen extent -2.47,-5 1,5.42, body extent -3,-5.08 3,5.08, height 1.7
SOIC18-WIDE [mm] "SOIC, 18-Leads"
  rect 2.4x0.65 smd: 1(-4.7,5.08)
  oval 2.4x0.65 smd: 2(-4.7,3.81) 3(-4.7,2.54) 4(-4.7,1.27) 5(-4.7,0) 6(-4.7,-1.27) 7(-4.7,-2.54) 8(-4.7,-3.81) 9(-4.7,-5.08) 10(4.7,-5.08) 11(4.7,-3.81) 12(4.7,-2.54) 13(4.7,-1.27) 14(4.7,0) 15(4.7,1.27) 16(4.7,2.54) 17(4.7,3.81) 18(4.7,5.08)
  silkscreen extent -3.2,-5.65 3.15,6.37, body extent -3.8,-5.65 3.85,5.64, height 1.91
SOP8_N [mm] "SOIC, 8-Leads, Body 4.9x3.9mm, Pitch 1.27mm, IPC Medium Density"
  rect 2x0.6 smd: 1(-2.5,1.905)
  oval 2x0.6 smd: 2(-2.5,0.635) 3(-2.5,-0.635) 4(-2.5,-1.905) 5(2.5,-1.905) 6(2.5,-0.635) 7(2.5,0.635) 8(2.5,1.905)
  silkscreen extent -2.62,-2.5 1.1,2.88, body extent -3,-2.54 3,2.54, height 1.7
SOT23_M [mm] "SOT23, 3-Leads, Body 2.9x1.3mm, Pitch 0.95mm, Lead Span 2.3mm - Reverse Pinning, IPC Low Density"
  rect 1.45x0.6 smd: 1(1.175,0) 2(-1.175,-0.95) 3(-1.175,0.95)
  silkscreen extent -2.28,-1.5 0.7,1.78, body extent -1.15,-1.5 1.15,1.5, height 1.1
SOT23_N [mm] "SOT23, 3-Leads, Body 2.9x1.3mm, Pitch 0.95mm, Lead Span 2.3mm - Reverse Pinning, IPC Medium Density"
  rect 1.15x0.6 smd: 1(1.125,0) 2(-1.125,-0.95) 3(-1.125,0.95)
  silkscreen extent -0.2,-1.5 1.47,1.5, body extent -1.25,-1.5 1.05,1.5, height 1.1
TQFP-64_N1 [mm] "64-Pin Thin Plastic Quad Flat Pack 0.5 mm Pitch, 1.0/0.1 mm Lead Form, IPC Medium Density"
  rect 1.8x0.3 smd: 1(-5.55,3.75)
  oval 1.8x0.3 smd: 2(-5.55,3.25) 3(-5.55,2.75) 4(-5.55,2.25) 5(-5.55,1.75) 6(-5.55,1.25) 7(-5.55,0.75) 8(-5.55,0.25) 9(-5.55,-0.25) 10(-5.55,-0.75) 11(-5.55,-1.25) 12(-5.55,-1.75) 13(-5.55,-2.25) 14(-5.55,-2.75) 15(-5.55,-3.25) 16(-5.55,-3.75) 33(5.55,-3.75) 34(5.55,-3.25) 35(5.55,-2.75) 36(5.55,-2.25) 37(5.55,-1.75) 38(5.55,-1.25) 39(5.55,-0.75) 40(5.55,-0.25) 41(5.55,0.25) 42(5.55,0.75) 43(5.55,1.25) 44(5.55,1.75) 45(5.55,2.25) 46(5.55,2.75) 47(5.55,3.25) 48(5.55,3.75)
  oval 0.3x1.8 smd: 17(-3.75,-5.55) 18(-3.25,-5.55) 19(-2.75,-5.55) 20(-2.25,-5.55) 21(-1.75,-5.55) 22(-1.25,-5.55) 23(-0.75,-5.55) 24(-0.25,-5.55) 25(0.25,-5.55) 26(0.75,-5.55) 27(1.25,-5.55) 28(1.75,-5.55) 29(2.25,-5.55) 30(2.75,-5.55) 31(3.25,-5.55) 32(3.75,-5.55) 49(3.75,5.55) 50(3.25,5.55) 51(2.75,5.55) 52(2.25,5.55) 53(1.75,5.55) 54(1.25,5.55) 55(0.75,5.55) 56(0.25,5.55) 57(-0.25,5.55) 58(-0.75,5.55) 59(-1.25,5.55) 60(-1.75,5.55) 61(-2.25,5.55) 62(-2.75,5.55) 63(-3.25,5.55) 64(-3.75,5.55)
  silkscreen extent -5.68,-4.25 4.25,4.57, body extent -5,-5 5,5, height 1.2
TSSOP8 [mm] "Shrink Small Outline, Plastic, Thin; 8 Leads; Body Width 4.4 mm; Pitch 0.65 mm"
  rect 0.3x1.65 smd: 1(-0.975,-2.775) 2(-0.325,-2.775) 3(0.325,-2.775) 4(0.975,-2.775) 5(0.975,2.775) 6(0.325,2.775) 7(-0.325,2.775) 8(-0.975,2.775)
  silkscreen extent -1.8,-2.9 1.55,1.55, body extent -1.52,-1.52 1.52,1.52, height 1
TXC_7A [mm]
  rect 2x2.5 smd: 1(-2.54,0) 2(2.54,0)
  silkscreen extent -3.57,-3.3 3.05,2.29, body extent -3.17,-2.41 3.05,2.25, height 1.3
Vishay293D-B [mm]
  rect 1.6x2.8 smd: 1(1.397,0) 2(-1.397,0)
  silkscreen extent -2.5,-1.63 2.5,1.63, body extent -1.75,-1.38 1.75,1.38, height 1.6
WE-PD2_1 [mm]
  rect 2.5x7.5 smd: 1(-2.794,0) 2(2.794,0)
  body extent -3.9,-3.49 3.89,3.49, height 5
WE-SCC_7345 [mm]
  rect 1.2x2.7 smd: 1(-0.9,-3) 2(0.9,-3) 3(0.9,3) 4(-0.9,3)
  silkscreen extent -3.76,-5.97 3.71,4.64, body extent -3.65,-3.67 3.65,3.63, height 5.8
WR-TBL-3127 [mm] "Header horizontal, 2 pins"
  rect 2.5x2.5 hole 1.7: 1(-2.54,0)
  round 2.5 hole 1.7: 2(2.54,0)
  silkscreen extent -5.04,-2 5.04,10, body extent -4.99,-1.91 5.01,10.09, height 8.75

## Part data
C1: "AVX ,  X5R, 20%, 10V"
C2 C3 C4 C5 C6 C9 C10 C11 C12: "TDK. CGA series, X7R, 10%, 16V"
C7 C8 C25: "AVX, 50V"
C13 C15 C21 C22 C29 C36 C37: "AVX, X5R, 10%, 25V"
C14 C27 C40: "Panasonic, FT series"
C16: "AVX ,  X7R, 5%, 50V"
C17 C18 C19 C20: "AVX ,  +-0.5pF, 50V"
C23 C24: "TDK  C series, X7R, 10%, 25V"
C26: "C series, X5R, 10%"
C28: "AVX,  X7R, 10%, 50V"
C30 C39: "293 series, tantal, 10%, 10V"
C31 C32 C33 C34: "C series, X5R, 10%, 50V"
C35: "TDK  C series, X5R, 10%, 25V"
C38: "C series, 5%, 50V"
C41: "293 series, tantal, 10%, 6.3V"
D1 D2: "Diode Schottky,2A,40V"
D3: "TVS, 400W, 58V"
D4 D5: "EDS diode(s)"
J1: library part "Ethernet, POE, WE7499210124A", "Modular Jack , Right Angle RJ-45, Low Profile"
JP1: "Plug, 11-Pin"
JP2: "Header-3-Pin"
JP3: "Header, 5-Pin"
L1: "Murata, Ferrit, 120Rx2A"
L2: library part 10uF2A_WE-PD2, "WE-PD2, 10uF2A"
L3: "WE, Ferrit, 300Rx2A"
L4: "Common mode choke"
L5: "Ferrit, 2k, 200mA"
M1 M2 M3: library part Mark
Q1: "Crystal, 7A-8.000MAAJ-T"
R1 R11 R12 R13 R15 R16 R17 R18 R19 R20 R21 R22: "Vishay CRCW series, 125mW, 1%"
R2 R7 R8 R9 R10: "Vishay CRCW series, 63mW, 1%"
R3 R4 R5 R6: "ERJ series, 500mW, 5%"
R14: "Vishay, CRCW series, 100mW, 1%"
U1: "High Performance ROM-less Microcontroller with External Memory Bus, 1.5K RAM, 64-Pin TQFP, 4.2 to 5.5V Supply Range, Industrial Temperature"
U2 U3: "1024 Kbit Serial SPI Bus EEPROM"
U4: "1 Mbit Serial  EEPROM"
U5: "2 kbit Serial  EEPROM"
U6: "Darlington array, 50V"
U7: "Ethernet Phy"
U8: "Crystal"
U9: library part Recom-R-783_3-0_5, "Voltage Regulator"
U10: "PoE, 12V"
U11: "RS232 transceiver"
X2 X4 X5 X6 X7: library part Header-2-WR-TBL3127, "Header 2 pin, horizontal,WR-TBL3127"

## Free pads (board coordinates)
  round 2.515 hole 2.515: 1(7.112,16.002) 1(92.1,66.015)

## Via types
v1: diameter 0.6, hole 0.381, Top Layer to Bottom Layer, 225 vias
v2: diameter 0.66, hole 0.33, Top Layer to Bottom Layer, tented top, 9 vias

## Nets (pads, with @x,y where several pads share a name; then routed paths per layer and width w, separated by ;. In a path a pad name is that pad's centre, name@x,y a point inside that pad or via, vN(x,y) a via of type N, cw(c..) or ccw(c..) an arc to the next point about the centre after c; other vN are vias at no path point)
3V3: C2.1 C3.1 C4.1 C5.1 C6.1 C9.1 C10.1 C11.1 C12.1 C23.1 C29.1 C30.1 C35.1 C36.1 C37.1 C41.1 JP2.2 JP3.5 L1.2 L3.2 R1.2 R12.2 R13.2 U1.10 U1.19 U1.26 U1.38 U1.57 U2.3 U2.7 U2.8 U3.3 U3.7 U3.8 U4.7 U4.8 U5.2 U7.12 U8.1 U8.4 U11.16 | length 78.6
  Top Layer w0.254: C30.1@19.952,29.663 C30.1 ; U11.16 U11.16@21.738,25.663 ; U5.2 37.865,65.196 39.472,63.589 39.472,58.445 40.116,57.801 C4.1 40.714,57.346 U1.38 ; U4.7 U4.8 42.424,71.33 v1(42.431,71.336) ; R13.2 v1(44.196,43.104) ; C37.1@47.244,41.029 v1(47.244,40.005) 47.769,39.48 U7.12 ; C2.1@47.863,47.744 U1.57 ; C2.1 48.704,47.744 v1(48.76,47.8) ; U1.10 55.076,56.846 C5.1 55.126,56.015 v1(55.118,56.007) ; L1.2 L1.2@55.703,30.365 ; C23.1@57.277,30.099 C23.1
  Top Layer w0.3: v1(46.744,68.699) C10.1 50.197,68.699 U2.3 ; U1.26 C3.1 46.863,64.135 v1(47.117,64.389) v1@46.99,64.389 ; v1(47.231,75.26) 48.217,75.26 C11.1 50.251,75.265 U3.3 ; U1.19 50.363,60.508 50.8,60.071 51.943,60.071 52.959,61.087 C6.1 54.991,61.095 v1(54.991,62.103) ; v1(53.429,76.53) U3.7 U3.8 ; U2.7 U2.8 55.205,72.604 v1(55.245,72.644) ; R1.2 57.793,54.237 JP3.5
  Top Layer w0.4: R12.2 v1@51.773,39.387 ; L1.2@55.703,30.365 C23.1 ; C23.1@57.277,30.099 v1(58.293,29.083)
  Top Layer w0.6: U11.16@21.738,25.663 C29.1 ; U8.4@56.26,37.351 56.26,39.903 56.388,40.03 v1@56.388,41.427
  Top Layer w0.7: v1(18.047,30.67) C30.1 ; C30.1@19.952,29.663 C29.1
  Top Layer w0.8: v1@65.253,66.205 C35.1 67.945,66.196 C41.1 67.943,62.622 L3.2
  Top Layer w1: JP2.2 v1(6.36,28.463)
  other v1: 51.778,39.383 56.388,41.44 39.484,61.011 65.253,66.192
12V: C13.1 D1.1 D2.1 JP1.9 U6.10 U9.1 X4.1 X5.1 X6.1 X7.1 | length 168.3
  Top Layer w0.7: X7.1@6.876,75.38 X7.1@6.96,75.38
  Top Layer w1: JP1.9@2,59.893 21.323,59.893 23.355,61.925 U6.10 ; 5.055,59.893 5.055,73.558 X7.1@6.876,75.38 ; D1.1@85.979,70.536 85.979,71.857 D2.1
  Top Layer w2: X7.1@6.96,75.38 11.806,80.226 56.413,80.226 61.544,75.095 61.544,50.508 64.033,48.019 U9.1@65.227,48.019 ; X6.1@17.47,75.38 17.47,80.226 ; X5.1@27.96,75.38 27.96,80.226 ; X4.1@38.475,75.38 38.475,80.226 ; 61.531,71.882 D2.1
GND: C1.2 C2.2 C3.2 C4.2 C5.2 C6.2 C7.2 C8.2 C9.2 C10.2 C11.2 C12.2 C13.2 C14.2 C15.2 C16.2 C17.2 C18.2 C19.2 C20.2 C21.2 C22.2 C23.2 C24.2 C25.2 C26.2 C27.2 C28.2 C29.2 C30.2 C33.2 C34.2 C35.2 C36.2 C37.2 C38.2 C39.2 C40.2 C41.2 D4.1 D5.1 J1.11 J1.13 J1.MH1 J1.MH2 JP2.1 JP3.2 R11.1 R14.1 U1.9 U1.20 U1.25 U1.41 U2.4 U3.4 U4.4 U5.1 U6.9 U7.24 U7.25 U7.33 U8.2 U9.2 U10.2 U11.15 X1.5 X1.10 X2.1 X3.5 X3.10 | length 79.6
  Top Layer w0.254: v1(19.837,19.355) C34.2 ; U6.9 23.355,54.267 v1(24.79,55.702) ; C8.2 37.236,62.014 38.068,62.846 U5.1 ; C7.2 39.976,55.846 U1.41 42.067,55.842 v1(43.739,55.842) ; C4.2 v1(40.259,59.817) ; C16.2 41.148,30.799 v1(41.148,31.877) 42.172,31.877 C21.2 ; C18.2 v1(43.307,26.924) ; C9.2 v1(44.679,70.129) ; U7.24 v1(44.969,32.374) 45.769,33.174 U7.25 ; C20.2 v1(45.593,26.924) ; C1.2@46.859,46.486 47.121,46.486 47.371,46.736 47.99,46.736 48.054,46.8 v1(48.76,46.8) ; C37.2@47.244,42.029 v1@47.244,43.307 ; C19.2 v1(47.371,26.924) ; C17.2 v1(49.657,26.924) ; v1(49.657,32.258) C22.2@50.486,31.428 ; v1(50.673,29.21) R14.1@51.624,30.161 ; v1(51.181,57.15) 51.985,56.346 U1.9 ; C25.2 52.27,38.673 C26.2 ; v1(53.086,39.878) C26.2 ; U8.2@54.493,38.291 54.112,38.673 C26.2 ; v1(54.848,33.671) R11.1 ; C24.2@55.741,28.333 C24.2 ; C5.2 56.126,56.015 v1(56.134,56.007)
  Top Layer w0.3: D5.1 v1(15.977,14.491) ; v1(35.42,67.234) 36.833,67.234 U4.4@36.849,67.249 ; U1.25 47.363,62.603 47.863,63.103 C3.2 v1(48.717,63.373) ; v1(47.371,67.691) 48.379,67.691 C10.2 48.887,67.699 49.149,67.437 U2.4 ; v1(49.863,59.738) U1.20 ; v1@53.137,39.827 v1(53.086,39.878) 55.215,39.878 C12.2 ; C38.2@54.323,35.497 v1(55.461,35.496) ; C6.2 v1(57.023,61.087) ; C36.2 66.446,68.58 v1(66.434,68.593) 71.819,68.593 72.111,68.301 ; v1(78.346,11.532) D4.1
  Top Layer w0.4: v1(27.153,17.462) 28.072,17.462 C33.2 ; v1(48.222,73.05) 48.222,73.927 48.285,73.99 U3.4 ; C24.2@55.741,28.333 v1(56.769,27.305)
  Top Layer w0.6: v1(22.746,33.084) C30.2 22.746,27.241 23,26.987 U11.15 ; C23.2 v1(57.277,33.655)
  Top Layer w1: JP2.1 v1(6.297,25.923)
  other v1: 76.416,40.678 74.016,40.78 75.12,41.631 78.486,42.202 73.939,42.532 76.568,42.583 75.197,43.383 77.737,43.383 79.464,43.383 47.244,43.5 73.939,44.234 76.568,44.336 72.072,45.034 77.838,45.326 75.171,45.479 72.847,45.86 76.441,46.304 72.047,46.812 79.337,46.876 74.041,47.13 75.171,48.057 76.746,49.035 77.114,53.924 77.191,55.956 77.622,58.331 80.645,58.522 75.489,58.572 79.515,59.753 74.536,59.957 76.34,60.033 81.293,60.477 73.495,61.481 37.652,62.43 74.867,62.624 81.293,63.005 79.096,63.246 73.444,63.424 76.34,63.627 72.339,64.63 78.219,64.897 75.463,66.205 73.215,66.281 79.845,66.802 77.787,66.904 72.238,67.704 74.168,67.729 76.848,68.072 79.146,68.224 77.864,69.177 75.616,69.278 73.546,69.304
  other v2: 46.319,34.741 47.519,34.741 48.719,34.741 46.319,35.941 47.519,35.941 48.719,35.941 46.319,37.141 47.519,37.141 48.719,37.141
NetC1_1: C1.1 U1.56 | length 2.7
  Top Layer w0.3: C1.1@46.736,48.084 46.736,48.337 47.363,48.964 U1.56
NetC7_1: C7.1 Q1.1 U1.40 | length 7.4
  Top Layer w0.254: Q1.1@35.065,55.474 36.208,55.474 36.678,55.944 36.957,55.944 37.36,56.346 U1.40
NetC8_1: C8.1 Q1.2 U1.39 | length 10.4
  Top Layer w0.254: Q1.2@35.065,60.406 35.593,60.935 C8.1 ; Q1.2@35.065,60.566 36.258,60.566 39.979,56.846 U1.39
NetC14_1: C14.1 C15.1 L3.1 U9.3 | length 5.6
  Top Layer w0.8: L3.1 71.869,59.817 71.869,56.891 C14.1
NetC16_1: C16.1 C21.1 C22.1 C24.1 J1.3 J1.4 L1.1 R7.2 R8.2 R9.2 R10.2 U7.1 U7.27 | length 18.3
  Top Layer w0.254: C16.1 43.307,30.607 ; R8.2 43.307,29.591 43.307,30.607 ; R10.2@45.593,28.825 v1(46.355,29.587) ; U7.27 46.769,32.989 45.53,31.75 43.307,31.75 43.307,30.607 ; R9.2@47.371,28.821 v1(47.371,29.972) ; R7.2 v1(49.657,30.099) 50.157,30.099 C22.1 ; U7.1 50.747,34.191 51.486,33.452 v1@51.486,33.426 ; C24.1 C24.1@54.291,28.498
  Top Layer w0.4: v1(54.102,26.416) 54.102,28.309 C24.1 ; C24.1@54.291,28.498 L1.1
  other v1: 43.307,29.972 51.511,33.439
NetC25_1: C25.1 C26.1 U7.6 | length 3.3
  Top Layer w0.254: U7.6 50.915,36.691 51.443,37.219 C25.1 53.032,37.219 C26.1
NetC27_1: C27.1 C39.1 L2.1 U10.1
  other v1: 86.957,40.513 94.259,40.907 88.087,41.072 85.623,41.212 95.72,41.478 86.957,41.821 93.955,42.278 88.113,42.596 85.598,42.672 96.634,42.723 94.996,42.977 86.957,43.37 88.087,44.107 85.598,44.171 93.916,44.386 95.745,44.386 97.523,44.386 86.957,45.517 88.367,45.517 89.827,45.517 91.351,45.517 92.951,45.517 94.869,45.517 96.685,45.517 86.119,47.041 87.668,47.041 89.141,47.041 90.742,47.041 92.342,47.041 94.12,47.041 95.809,47.041 86.957,48.171 88.557,48.171 90.132,48.171 91.605,48.171 93.32,48.171 94.996,48.171 96.825,48.171 89.218,50.063 91.123,50.063 92.926,50.063 94.92,50.063 96.914,50.063 88.354,51.498 90.221,51.498 92.011,51.498 93.916,51.498 95.783,51.498 92.977,52.794 89.243,52.819 96.749,52.819 91.046,52.832 94.805,52.883 84.353,54.381 86.119,54.712 96.075,55.118 84.544,55.626
NetC28_1: C28.1 C40.1 D1.2 L2.2 | length 8.5
  Top Layer w1: C28.1@83.849,67.767 85.665,65.951 85.97,65.951 ; L2.2@89.361,61.011 L2.2
  Top Layer w1.5: C40.1@85.97,61.912 85.97,65.951
NetC31_1: C31.1 U11.3 | length 2
  Top Layer w0.254: C31.1@23.561,19.256 24.27,19.964 U11.3
NetC31_2: C31.2 U11.1 | length 2.1
  Top Layer w0.254: U11.1 21.73,19.952 C31.2@22.496,19.186
NetC32_1: C32.1 U11.5 | length 1.7
  Top Layer w0.254: C32.1 26.81,19.401 U11.5
NetC32_2: C32.2 U11.4 | length 1.7
  Top Layer w0.254: U11.4 25.54,19.401 C32.2
NetC33_1: C33.1 U11.6 | length 2.5
  Top Layer w0.254: C33.1 U11.6
NetC34_1: C34.1 U11.2 | length 4.5
  Top Layer w0.254: C34.1 20.709,22.276 22.377,22.276 23,21.653 U11.2
NetC38_1: C38.1 L5.1 R2.2 U7.5 | length 12.9
  Top Layer w0.254: U7.5 52.527,36.191 52.531,36.195 53.323,36.195 53.467,36.051 53.467,35.641 C38.1@53.323,35.497 ; v1(54.978,41.885) L5.1
  Bottom Layer w0.254: v1@52.553,36.208 54.978,38.633 v1(54.978,41.885)
  other v1: 52.527,36.208
NetD2_2: D2.2 X2.2 | length 4.4
  Top Layer w1: 92.04,74.108 X2.2@92.04,75.38
  Top Layer w2: D2.2 92.04,74.108
NetD3_1: D3.1 L4.4 U10.4 | length 11
  Top Layer w1: L4.4 71.309,19.607 71.945,20.244 U10.4@71.945,25.959 ; U10.4@69.456,25.884 71.92,25.884 U10.4@71.958,25.846
NetD3_2: D3.2 L4.3 U10.5 | length 26.3
  Top Layer w1.2: L4.3 74.747,17.807 78.721,21.78 82.824,25.884 89.776,25.884 U10.5@92.316,25.884
NetD4_2: D4.2 R20.1 X3.2 | length 5.8
  Top Layer w0.254: R20.1 77.353,15.227 D4.2 77.396,14.15 76.887,13.641 X3.2
NetD4_3: D4.3 R19.1 X3.3 | length 7.9
  Top Layer w0.254: R19.1@76.357,16.04 78.44,16.04 D4.3 79.63,14.85 X3.3
NetD5_2: D5.2 R21.2 X1.3 | length 16.5
  Top Layer w0.254: R21.2 15.027,16.376 D5.2 15.027,12.494 16.18,11.341 16.18,9.868 17.412,8.636 17.412,7.404 18.148,6.667 19.317,6.667 20.147,7.498 X1.3
NetD5_3: D5.3 R22.2 X1.2 | length 6
  Top Layer w0.254: R22.2 16.927,16.439 D5.3 16.927,13.033 17.404,12.555 X1.2
NetJ1_9: J1.9 L4.2 | length 32.5
  Top Layer w1.3: v1(59.969,7.125) 59.969,14.453 L4.2@63.348,17.831
  Bottom Layer w1.3: J1.9 53.285,5.22 58.077,5.22 v1@59.976,7.118
NetJ1_10: J1.10 L4.1 | length 46.6
  Top Layer w1: v1(63.081,21.285) 63.081,19.922 L4.1
  Bottom Layer w1.3: J1.10 42.164,16.169 42.164,13.233 52.045,3.353 59.474,3.353 63.081,6.96 v1(63.081,21.285)
NetJ1_12: J1.12 U7.3 | length 16
  Top Layer w0.254: U7.3 50.939,35.191 51.181,35.433 v1(52.07,35.433)
  Bottom Layer w0.254: J1.12 51.525,23.483 52.07,24.028 v1(52.07,35.433)
NetJ1_14: J1.14 R11.2 U7.2 | length 62.8
  Top Layer w0.254: J1.14 41.593,20.199 41.593,13.729 50.444,4.877 54.737,4.877 58.344,8.484 58.344,19.863 v1(52.845,25.362) ; U7.2 v1(52.832,34.691) 53.828,34.691 R11.2
  Bottom Layer w0.254: v1@52.832,25.362 v1(52.832,34.691)
NetJP1_3: JP1.3 U1.44 | length 44.1
  Top Layer w0.254: v1(26.124,52.565) 39.357,52.565 41.138,54.346 U1.44
  Bottom Layer w0.254: JP1.3 9.861,52.565 v1(26.124,52.565)
NetJP1_4: JP1.4 U1.43 | length 43.2
  Top Layer w0.254: v1(25.273,53.251) 39.141,53.251 40.736,54.846 U1.43
  Bottom Layer w0.254: JP1.4 8.007,53.251 v1(25.273,53.251)
NetJP1_5: JP1.5 U1.53 | length 46.3
  Top Layer w0.254: JP1.5 4.991,49.784 6.896,47.879 44.107,47.879 45.863,49.635 U1.53
NetJP1_6: JP1.6 U1.42 | length 41.3
  Top Layer w0.254: v1(26.543,54.038) 39.268,54.038 40.576,55.346 U1.42
  Bottom Layer w0.254: JP1.6 3.715,54.038 v1(26.543,54.038)
NetJP1_7: JP1.7 U1.55 | length 55.9
  Top Layer w0.254: JP1.7 0.622,53.486 0.622,49.149 1.232,48.539 4.623,48.539 6.629,46.533 43.891,46.533 46.863,49.505 U1.55
NetJP1_8: JP1.8 U1.14 | length 51.8
  Top Layer w0.254: v1(50.869,58.846) U1.14
  Bottom Layer w0.254: JP1.8 3.219,58.623 43.458,58.623 43.681,58.846 v1(50.869,58.846)
NetJP1_10: JP1.10 U1.45 | length 51.6
  Top Layer w0.254: U1.45 42.886,53.846 44.475,55.435 44.475,59.22 v1(42.774,60.922)
  Bottom Layer w0.254: JP1.10 3.054,63.538 38.811,63.538 41.427,60.922 v1(42.774,60.922)
NetJP2_3: JP2.3 U1.54 | length 56
  Top Layer w0.254: v1(13.183,47.219) 44.031,47.219 46.363,49.551 U1.54
  Bottom Layer w0.254: JP2.3 2,36.036 v1(13.183,47.219)
NetJP3_1: JP3.1 U1.16 | length 5.3
  Top Layer w0.3: U1.16 58.322,59.846 JP3.1
NetJP3_3: JP3.3 U1.15 | length 6.1
  Top Layer w0.3: U1.15 56.478,59.346 JP3.3
NetJP3_4: JP3.4 R1.1 U1.7 | length 5.6
  Top Layer w0.3: U1.7 57.632,55.346 JP3.4
NetL5_2: L5.2 U1.63 | length 9.5
  Top Layer w0.3: U1.63 v1@50.863,52.185 ; L5.2@54.953,46.034 v1(54.953,48.031)
  Bottom Layer w0.3: v1@50.902,52.197 v1(50.876,52.197) 54.953,48.12 v1(54.953,48.031)
NetR2_1: R2.1 U8.3 | length 1.2
  Top Layer w0.3: R2.1@54.323,36.195 54.323,37.085 U8.3
NetR3_1: R3.1 U6.18 | length 8.6
  Top Layer w0.6: R3.1 11.593,70.576 13.195,68.974 U6.18
NetR3_2: R3.2 U6.17 X7.2 | length 14.2
  Top Layer w0.6: X7.2@12.04,75.082 X7.2@12.04,75.38 ; X7.2@12.268,74.918 12.04,75.146 X7.2@12.04,75.38 ; U6.17@14.453,63.068 14.453,70.98 14.503,71.031 14.503,72.917 X7.2@12.04,75.38
NetR4_1: R4.1 U6.16 | length 8.6
  Top Layer w0.6: U6.16 15.735,69.367 16.698,70.33 R4.1@16.698,71.476
NetR4_2: R4.2 U6.15 X6.2 | length 14.9
  Top Layer w0.6: U6.15 17.005,68.008 19.624,70.627 19.624,73.381 21.623,75.38 X6.2@22.55,75.38
NetR5_1: R5.1 U6.14 | length 9.8
  Top Layer w0.6: U6.14 18.275,66.83 22.365,70.919 R5.1
NetR5_2: R5.2 U6.13 X5.2 | length 19.8
  Top Layer w0.6: U6.13 19.545,65.583 21.793,67.831 22.733,67.831 25.184,70.282 27.942,70.282 X5.2@33.04,75.38
NetR6_1: R6.1 U6.12 | length 9
  Top Layer w0.6: U6.12 20.815,64.884 22.492,66.561 24.649,66.561 R6.1
NetR6_2: R6.2 U6.11 X4.2 | length 27.1
  Top Layer w0.6: U6.11 22.085,64.402 23.152,65.468 27.203,65.468 32.347,70.612 38.787,70.612 X4.2@43.555,75.38
NetR12_1: R12.1 U7.9 | length 1.6
  Top Layer w0.254: U7.9 R12.1@50.914,38.491
NetR13_1: R13.1 U1.49 U7.16 | length 19.7
  Top Layer w0.254: v1(42.76,50.546) U1.49 ; v1(43.434,39.116) 44.196,39.116 ; R13.1@44.188,40.072 44.188,40.132 R13.1 44.196,39.116 ; U7.16 45.144,39.116 44.196,39.116
  Bottom Layer w0.254: v1(42.76,50.546) 39.941,47.728 39.941,41.212 42.037,39.116 v1(43.434,39.116)
NetR14_2: R14.2 U7.32 | length 3.2
  Top Layer w0.254: U7.32 50.113,33.391 R14.2
NetR15_1: R15.1 U7.10 | length 1.7
  Top Layer w0.254: U7.10 48.769,39.447 R15.1@49.314,39.992
NetR15_2: R15.2 U1.60 | length 9.5
  Top Layer w0.3: R15.2@49.363,41.046 U1.60
NetR16_1: R16.1 U7.11 | length 1.8
  Top Layer w0.254: U7.11 R16.1@48.269,40.284
NetR16_2: R16.2 U1.61 | length 11.1
  Top Layer w0.254: R16.2@48.26,41.326 v1@48.26,42.786
  Top Layer w0.3: U1.61 49.863,43.457 50.038,43.282 v1@50.038,42.774
  Bottom Layer w0.254: v1(48.26,42.761) v1(50.038,42.761)
NetR17_1: R17.1 U7.13 | length 3
  Top Layer w0.254: R17.1 46.228,40.005 47.269,38.964 U7.13
NetR17_2: R17.2 U1.64 | length 13.8
  Top Layer w0.3: R17.2 v1(46.228,44.831) ; v1@51.363,44.856 U1.64 ; v1@51.371,44.895 v1@51.435,44.831
  Bottom Layer w0.3: v1(46.228,44.831) 51.371,44.831 v1@51.435,44.831
  other v1: 51.363,44.831
NetR18_1: R18.1 U7.15 | length 3
  Top Layer w0.254: R18.1 45.212,40.132 46.269,39.075 U7.15
NetR18_2: R18.2 U1.62 | length 14.1
  Top Layer w0.3: R18.2 v1(45.212,45.466) ; U1.62 50.363,49.586 50.673,49.276 v1(50.673,45.466)
  Bottom Layer w0.3: v1(45.212,45.466) v1(50.673,45.466)
NetR19_2: R19.2 U11.7 | length 69.8
  Top Layer w0.254: U11.7@29.362,20.917 29.362,21.539 30.201,22.377 31.852,22.377 36.881,17.348 36.881,5.182 39.738,2.324 57.036,2.324 62.255,7.544 62.255,10.503 67.78,16.027 R19.2@75.357,16.027
NetR20_2: R20.2 U11.8 | length 66.8
  Top Layer w0.254: U11.8 32.132,20.954 36.36,16.726 36.36,4.966 39.51,1.816 57.302,1.816 62.776,7.29 62.776,10.3 67.704,15.227 R20.2
NetR21_1: R21.1 U11.14 | length 15.5
  Top Layer w0.254: R21.1 15.011,21.273 17.818,24.079 23.685,24.079 24.27,24.663 U11.14
NetR22_1: R22.1 U11.13 | length 15.2
  Top Layer w0.254: R22.1 16.955,21.501 18.644,23.19 24.536,23.19 25.54,24.194 U11.13
NetU1_1: U1.1 U7.21 | length 28.4
  Top Layer w0.254: v1@42.164,40.602 42.164,37.986 44.459,35.691 U7.21 ; v1@52.07,40.602 52.07,49.441 53.163,50.534 U1.1
  Bottom Layer w0.254: v1(42.164,40.589) v1@52.045,40.589
  other v1: 52.07,40.589
NetU1_2: U1.2 U7.22 | length 32.5
  Top Layer w0.254: v1(41.529,41.199) 41.529,37.935 44.273,35.191 U7.22 ; v1@52.832,41.212 52.832,49.653 54.369,51.189 54.369,52.684 54.207,52.846 U1.2
  Bottom Layer w0.254: v1(41.529,41.199) v1(52.832,41.199)
NetU1_3: U1.3 U7.23 | length 35.5
  Top Layer w0.254: v1(40.754,41.783) 40.754,38.062 44.125,34.691 U7.23 ; U1.3 54.236,53.346 54.775,52.807 54.775,51.067 53.543,49.835 v1@53.543,41.796
  Bottom Layer w0.254: v1(40.754,41.783) v1(53.543,41.783)
NetU1_4: U1.4 U11.10 | length 42.9
  Top Layer w0.254: U11.10 v1(29.35,28.207) ; v1(44.793,52.121) 45.39,52.121 47.115,53.846 U1.4
  Bottom Layer w0.254: v1(29.35,28.207) 38.735,37.592 38.735,47.625 43.231,52.121 v1(44.793,52.121)
NetU1_5: U1.5 U11.12 | length 51.7
  Top Layer w0.254: U11.12 26.81,25.082 28.677,23.216 32.372,23.216 33.757,24.6 v1(33.757,34.379) ; v1(44.196,52.807) 44.933,52.807 46.472,54.346 U1.5
  Bottom Layer w0.254: v1(33.757,34.379) 37.846,38.468 37.846,47.6 43.04,52.794 v1@44.234,52.794
NetU1_6: U1.6 U11.11 | length 49.8
  Top Layer w0.254: U11.11 28.08,24.994 29.223,23.851 31.382,23.851 32.182,24.651 v1(32.182,34.43) ; v1@44.729,53.53 46.045,54.846 U1.6
  Bottom Layer w0.254: v1(32.182,34.43) 37.084,39.332 37.084,47.879 42.723,53.518 v1@44.755,53.518
  other v1: 44.742,53.53
NetU1_8: U1.8 U11.9 | length 44.8
  Top Layer w0.254: U11.9 v1(30.62,34.709) ; v1(44.094,54.14) 45.8,55.846 U1.8
  Bottom Layer w0.254: v1(30.62,34.709) 35.903,39.992 35.903,47.587 42.443,54.127 v1@44.094,54.127
NetU1_13: U1.13
NetU1_17: U1.17 U4.1 | length 22.2
  Top Layer w0.3: U4.1 38.763,69.199 41.656,66.307 v1(41.656,61.722) ; U1.17 51.439,61.722 v1(52.324,61.722)
  Bottom Layer w0.3: v1(41.656,61.722) v1(52.324,61.722)
NetU1_18: U1.18 U2.1 | length 10.4
  Top Layer w0.3: U2.1@50.8,71.374 51.689,70.485 51.689,66.675 50.863,65.849 U1.18
NetU1_21: U1.21 U3.1 | length 21.3
  Top Layer w0.3: U1.21 v1(49.363,64.262) ; U3.1 51.638,77.8 52.705,76.733 v1(52.705,64.262)
  Bottom Layer w0.3: v1(49.363,64.262) v1(52.705,64.262)
NetU1_23: U1.23 U6.6 | length 37.6
  Top Layer w0.254: U6.6 v1(19.545,57.201) ; U1.23 48.363,60.514 49.085,59.792 v1(49.085,57.201)
  Bottom Layer w0.254: v1(19.545,57.201) v1(49.085,57.201)
NetU1_24: U1.24 U6.8 | length 33.8
  Top Layer w0.254: U6.8 v1(22.085,57.861) ; U1.24 47.863,60.392 48.108,60.147 v1(48.108,57.861)
  Bottom Layer w0.254: v1(22.085,57.861) v1(48.108,57.861)
NetU1_29: U1.29 U2.6 U3.6 U4.6 | length 31.7
  Top Layer w0.3: U4.6 43.365,67.899 v1(45.363,65.902) U1.29 ; U2.6 56.845,68.707 ; U3.6 56.185,75.26 56.845,74.6 56.845,68.707 ; v1(56.845,65.913) 56.845,68.707
  Bottom Layer w0.3: v1@45.363,65.913 v1(56.845,65.913)
NetU1_30: U1.30 U7.17 | length 27.2
  Top Layer w0.3: v1(42.799,43.485) 42.799,38.481 43.589,37.691 U7.17 ; U1.30 44.943,61.566 44.943,60.722 45.695,59.97 v1(45.695,56.604)
  Bottom Layer w0.3: v1(42.799,43.485) 42.799,46.355 45.682,49.238 45.682,56.591 v1(45.695,56.604)
NetU1_31: U1.31 U2.2 U3.2 U4.2 | length 34.6
  Top Layer w0.3: U4.2 38.194,68.549 40.894,65.849 v1(40.894,64.008) ; U1.31 v1(44.363,64.008) ; v1(46,64.008) 46,69.977 ; U2.2 46,69.977 ; U3.2 47.473,76.53 46,75.058 46,69.977
  Bottom Layer w0.3: v1(40.894,64.008) v1(44.363,64.008) v1(46,64.008)
NetU1_32: U1.32 U2.5 U3.5 U4.5 | length 29.7
  Top Layer w0.3: U4.5@42.399,67.249 42.399,63.11 U1.32 ; v1(55.118,65.024) 55.118,67.35 U2.5 54.102,67.437 53.848,67.691 53.848,72.582 U3.5
  Bottom Layer w0.3: v1(42.418,65.024) v1(55.118,65.024)
NetU1_33: U1.33 U5.3 | length 6.4
  Top Layer w0.254: U5.3 40.081,64.622 40.081,61.828 U1.33
NetU1_46: U1.46 U6.1 | length 32.1
  Top Layer w0.254: v1(13.195,51.435) U6.1 ; v1(24.638,51.435) 38.989,51.435 40.9,53.346 U1.46
  Bottom Layer w0.254: v1(13.195,51.435) v1(24.638,51.435)
NetU1_47: U1.47 U6.4 | length 29.1
  Top Layer w0.254: v1(17.005,50.736) U6.4 ; v1(23.5,50.74) 39.081,50.74 41.187,52.846 U1.47
  Bottom Layer w0.254: v1@17.005,50.74 v1(23.5,50.74)
NetU1_48: U1.48 U6.2 | length 32.4
  Top Layer w0.254: v1(14.465,50.038) U6.2 ; v1(24.511,50.038) 39.484,50.038 41.792,52.346 U1.48
  Bottom Layer w0.254: v1(14.465,50.038) v1(24.511,50.038)
NetU1_50: U1.50 U6.7 | length 28.6
  Top Layer w0.254: U6.7 20.815,51.46 22.873,49.403 39.535,49.403 41.923,51.791 44.031,51.791 44.348,51.473 U1.50@44.348,50.813
NetU1_51: U1.51 U6.5 | length 31.4
  Top Layer w0.254: U6.5 18.275,51.117 20.447,48.946 44.074,48.946 44.863,49.735 U1.51
NetU1_52: U1.52 U6.3 | length 35.4
  Top Layer w0.254: U6.3 15.735,50.228 17.437,48.527 44.196,48.527 45.363,49.694 U1.52
RX_N: C19.1 J1.6 R9.1 U7.30 | length 18.4
  Top Layer w0.254: C19.1 48.26,24.384 ; R9.1 48.252,27.948 48.26,27.94 ; J1.6 48.133,17.058 48.133,18.161 48.26,18.288 48.26,24.384 ; 48.252,27.059 48.26,27.051 ; U7.30@48.26,33.391 48.26,27.94 ; 48.26,24.384 48.26,27.051 ; 48.26,27.051 48.26,27.94
RX_P: C17.1 J1.5 R7.1 U7.31 | length 21
  Top Layer w0.254: U7.31 48.768,28.067 ; 48.776,27.059 48.768,27.051 ; J1.5 49.235,17.44 48.768,17.907 48.768,24.384 ; C17.1 48.768,24.384 ; R7.1 48.776,28.059 48.768,28.067 ; 48.768,24.384 48.768,27.051 ; 48.768,27.051 48.768,28.067
TX_N: C18.1 J1.2 R8.1 U7.28 | length 38.2
  Top Layer w0.254: C18.1 44.136,24.384 ; R8.1 44.131,27.821 ; 44.191,29.723 44.191,29.713 44.136,29.658 44.136,23.745 45.085,22.797 46.1,22.797 46.731,22.166 46.731,21.274 46.452,20.995 46.452,16.159 47.722,14.889 47.722,13.536 48.685,12.573 53.256,12.573 54.006,13.323 55.18,13.323 55.342,13.485 55.342,15.215 55.18,15.377 54.558,15.377 J1.2 ; 44.196,29.728 45.144,30.676 45.154,30.676 47.269,32.791 U7.28
TX_P: C20.1 J1.1 R10.1 U7.29 | length 32.2
  Top Layer w0.254: 44.665,27.821 R10.1 ; 44.67,24.384 C20.1 ; U7.29 47.769,32.573 44.644,29.448 44.644,23.956 45.295,23.305 46.316,23.305 47.239,22.382 47.239,21.063 46.863,20.687 46.863,16.466 48.208,15.121 48.208,13.768 48.895,13.081 53.046,13.081 J1.1 J1.1@54.315,14.183
pads on no net: J1.7 J1.8 J1.MH3 J1.MH4 JP1.1 JP1.2 JP1.11 JP1.12 M1.0 M2.0 M3.0 U1.11 U1.12 U1.22 U1.27 U1.28 U1.34 U1.35 U1.36 U1.37 U1.58 U1.59 U4.3 U7.4 U7.7 U7.8 U7.14 U7.18 U7.19 U7.20 U7.26 U10.3 X1.1 X1.4 X1.6 X1.7 X1.8 X1.9 X3.1 X3.4 X3.6 X3.7 X3.8 X3.9

## Polygon pours and split planes (outlines as drawn)
GND on GND "GND" (solid, pour order 11): 3.048,80.645 3.048,0.635 96.127,0.635 96.509,0.635 96.509,80.645
NetC16_1 on 3V3 "3V3" (solid, pour order 5): 40.005,9.284 59.093,9.284 59.093,26.886 51.054,34.925 43.942,34.925 40.005,32.385
3V3 on 3V3 "3V3" (solid, pour order 9): 39.497,15.24 39.497,32.512 43.815,35.306 51.181,35.306 59.817,26.67 59.817,15.24 96.647,15.24 96.647,79.731 3.556,79.731 3.556,15.24

## Keep-outs
Keep-Out Layer:
  region: 95.186,32.893 95.186,39.611 66.675,39.611 66.675,32.893

## Other copper
Top Layer:
  region net NetD3_1: 68.745,27.927 68.097,27.28 68.097,19.101 68.123,19.075 71.463,19.075 73.393,21.006 73.393,27.559 73.063,27.889
  region net NetD3_2: 74.557,18.461 84.15,28.054 93.307,28.054 93.307,23.444 93.18,23.317 83.325,23.317 77.216,17.209 74.537,17.209
  region net NetC27_1: 84.559,56.772 96.835,56.772 98.069,55.537 98.069,42.329 95.644,39.903 85.407,39.903 83.109,42.202 83.109,55.321
  region net NetC28_1: 87.185,59.703 83.414,63.475 83.414,68.936 83.972,68.936 85.458,67.45 86.462,67.45 92.037,61.874 92.037,59.703
  region net GND: 71.361,39.903 71.361,46.825 68.72,49.466 64.77,49.467 64.135,50.102 64.135,51.016 64.643,51.524 66.358,51.524 67.996,53.162 81.331,53.162 82.004,52.489 82.004,44.171 77.737,39.903
  region net GND: 73.368,59.575 73.368,52.832 73.317,52.781 73.558,52.54 81.991,52.54 81.991,68.478 80.416,70.053 72.288,70.053 69.888,67.653 69.888,61.201 70.155,60.935 72.047,60.935 72.784,60.198 72.784,59.575
  region net NetC14_1: 65.926,52.133 68.224,54.432 72.415,54.432 72.542,54.559 72.542,58.966 71.653,59.855 69.609,59.855 64.084,54.331 64.084,52.616 64.567,52.133
  text "MN7" at 20.688,42.151 h2.2
  text "MMC 2.4" at 20.612,40.094 h1.27
  text "PN10027" at 20.523,38.24 h1.3
Bottom Layer:
  rectangle net GND: 43.942,32.766 51.054,39.497
  region net NetC27_1: 94.615,56.617 97.003,56.617 98.095,55.524 98.095,42.367 95.644,39.916 85.407,39.916 83.109,42.215 83.109,55.334 84.391,56.617
  region net GND: 71.666,39.967 77.864,39.967 81.978,44.082 81.978,68.415 80.073,70.32 65.964,70.32 65.926,70.282 65.926,59.474 71.183,54.216 71.183,39.967

## Silkscreen, mask and mechanical layers (free items; w line width, h text height)
Top Solder:
  text "MN7" at 20.688,42.164 h2.2
  text "MMC 2.4" at 20.625,40.119 h1.27
  text "PN10027" at 20.536,38.265 h1.3
Fail:
  lines w0.05: -27.305,91.567 -27.051,91.567
Mechanical 17:
  lines w0.05: 3.556,15.24 39.497,15.24 39.497,32.512 43.815,35.306 51.181,35.306 59.817,26.67 59.817,15.24 96.647,15.24 96.647,78.486 3.556,78.486 3.556,15.24 ; 40.005,14.732 52.07,14.732 52.07,20.701 54.61,20.701 54.61,31.369 51.054,34.925 43.942,34.925 40.005,32.385 40.005,14.732
Outline:
  the board outline again, w0.254

## Dimensions
0,0 to 99.212,0 on Mechanical 16
99.212,0 to 99.212,82.017 on Mechanical 16

## Text inside footprints (layer, text, board x,y; h text height)
C30: Top Overlay "+" at 18.599,29.67 h0.6 r180
C39: Top Overlay "+" at 85.224,46.911 h0.6
C41: Top Overlay "+" at 66.592,61.624 h0.6 r180
X1: Top Overlay "1" at 12.527,10.035 h1.97; Top Overlay "5" at 27.386,10.035 h1.97; Top Overlay "9" at 27.386,7.495 h1.97; Top Overlay "6" at 12.527,7.368 h1.97
X3: Top Overlay "1" at 72.01,10.035 h1.97; Top Overlay "5" at 86.869,10.035 h1.97; Top Overlay "9" at 86.869,7.495 h1.97; Top Overlay "6" at 72.01,7.368 h1.97